# Allegro board pc053a_toplevel_08.brd
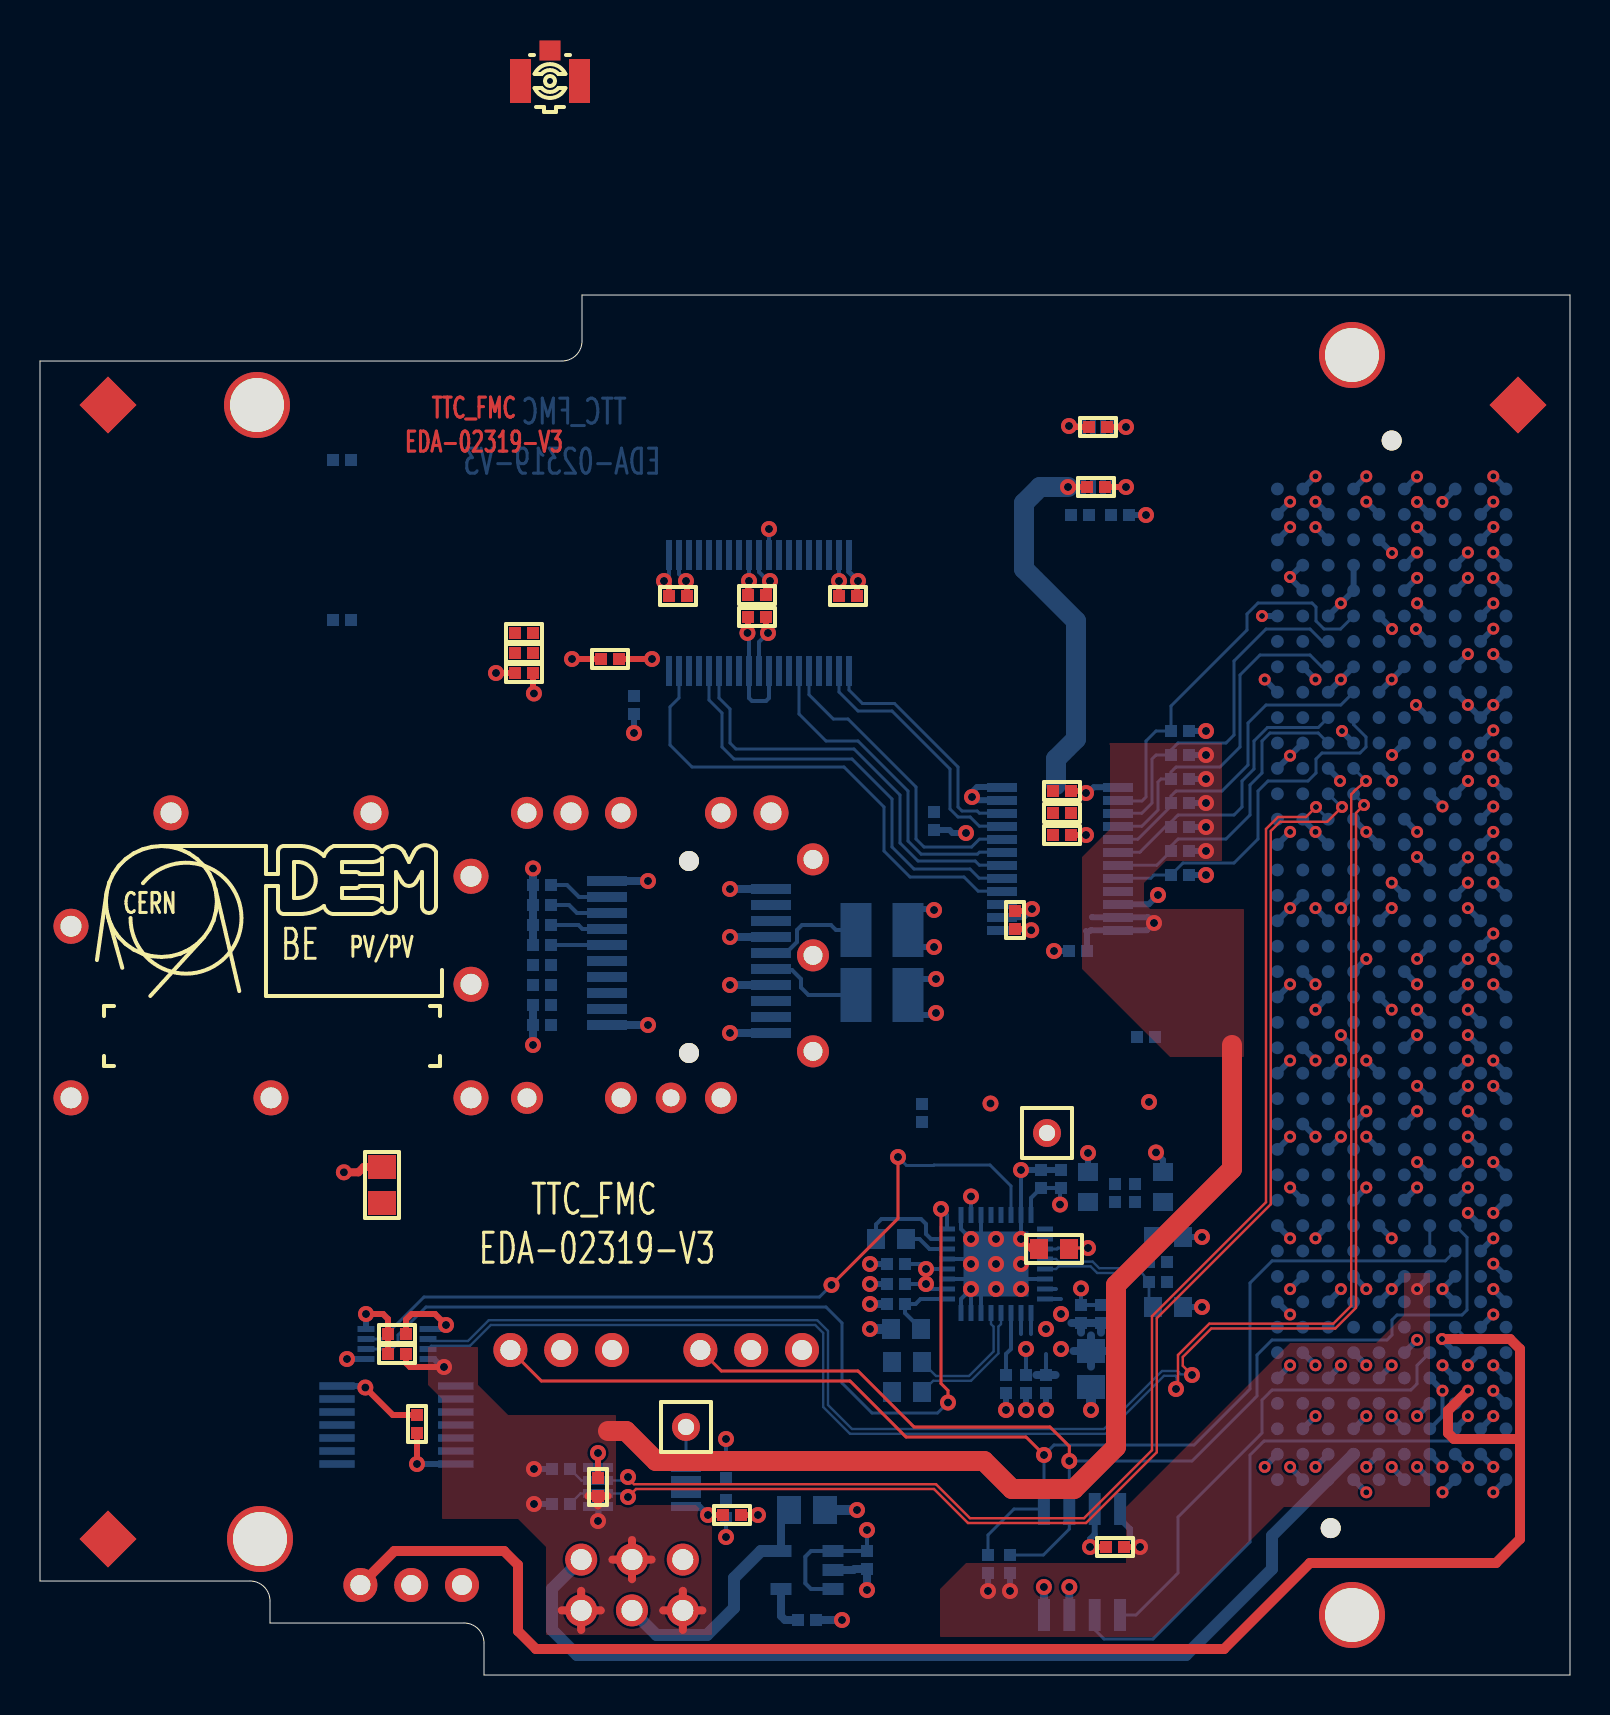
[diagram p0: board, top side]
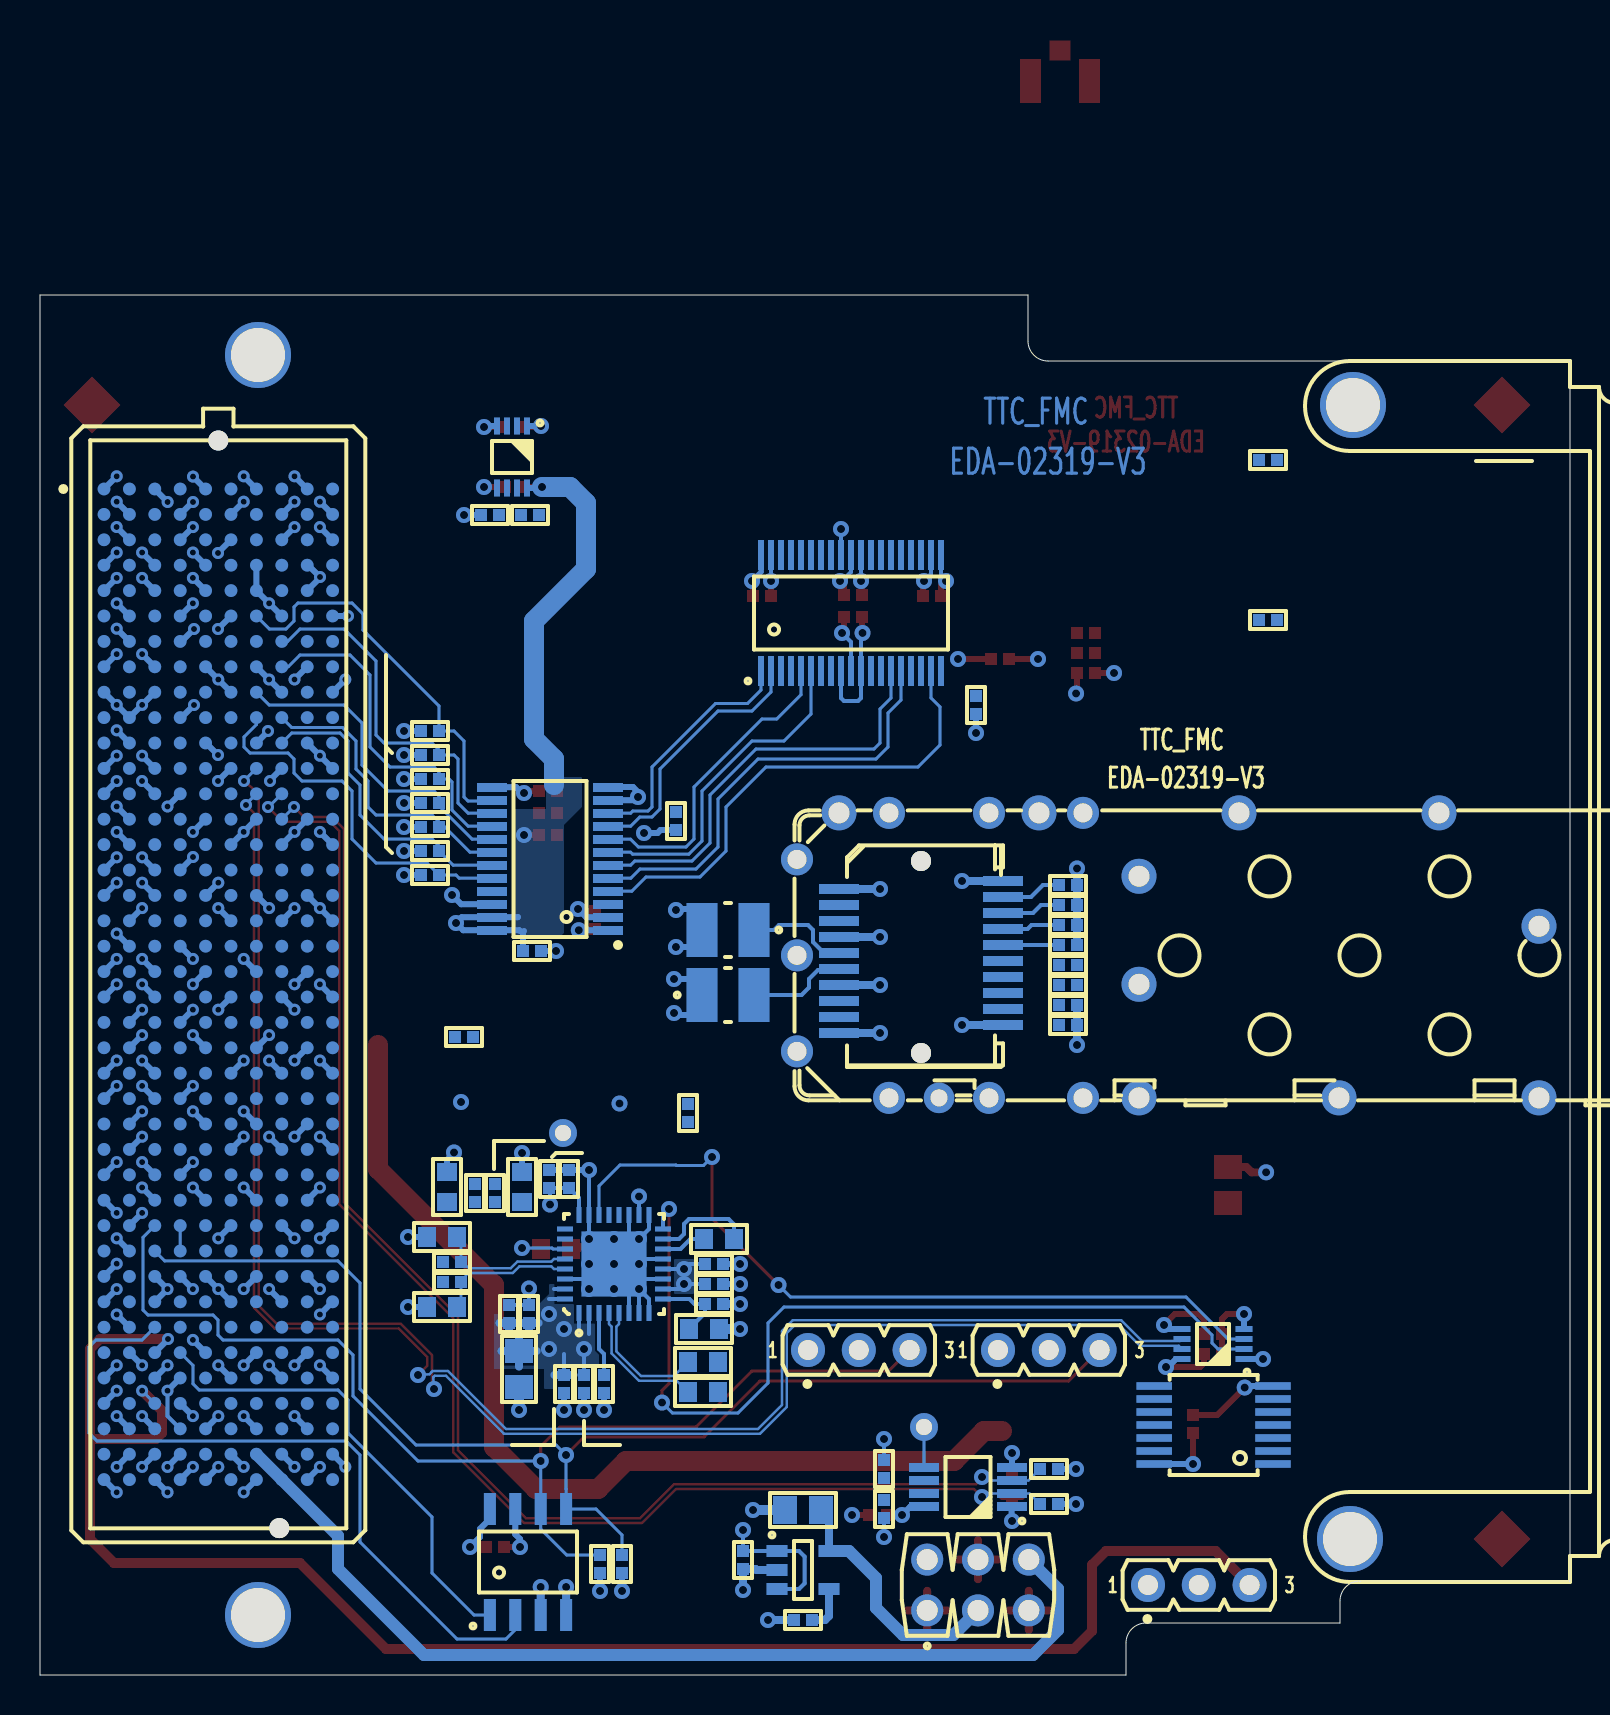
[diagram p1: board, bottom side, seen from below]

Outline 76.5 x 69 mm; copper layers: TOP, L2PWR, L3GND, BOTTOM. Coordinates in mm from the lower left corner of the outline.
Outline path: 0,65.7 26.1,65.7 arc(26.81,65.99) 27.1,66.7 27.1,69 76.5,69 76.5,0 22.2,0 22.2,1.6 arc(21.91,2.31) 21.2,2.6 11.5,2.6 11.5,3.7 arc(11.21,4.41) 10.5,4.7 0,4.7 0,65.7

## Design rules (mm)
constraint set DEFAULT: min track width 0.15
net group CDR_CLKOUT: nets CDR_CLKO_N CDR_CLKO_P
net group CDR_DATAOUT: nets CDR_DO_N CDR_DO_P
net group DATAOUT: nets DATAOUT_N DATAOUT_P
net group FMC_LA06: nets FMC_LA06_N FMC_LA06_P
net group FMC_LA07: nets FMC_LA07_N FMC_LA07_P
net group FMC_LA08: nets FMC_LA08_N FMC_LA08_P
net group FMC_LA10: nets FMC_LA10_N FMC_LA10_P
net group IN: nets IN_N IN_P
nets with their own width: min track width 0.3; nets CVCC GND P3V3

## Placement (name value [footprint] x y rotation side)
C1  100nF  [C0402]  24.2 50.1 180 top
C2  100nF  [C0402]  28.5 50.8 180 top
C3  100nF  [C0402]  31.9 53.95 0 top
C4  100nF  [C0402]  35.85 54 180 top
C5  100nF  [C0402]  35.85 52.9 180 top
C6  100nF  [C0402]  40.4 53.95 180 top
C7  100nF  [C0402]  52.9 62.4 0 top
C8  100nF  [C0402]  52.8 59.4 180 top
C10  100nF  [C0402]  51.1 44.2 180 top
C11  100nF  [C0402]  48.75 37.75 270 top
C12  2.2uF  [C0805]  17.1 24.5 270 top
C13  100nF  [C0402]  17.85 17.05 180 top
C14  100nF  [C0402]  17.85 16.05 0 top
C15  100nF  [C0402]  18.85 12.55 270 top
C16  100nF  [C0402]  27.9 9.4 270 top
C17  100nF  [C0402]  34.6 8 180 top
C18  100nF  [C0402]  53.75 6.4 0 top
C20  100nF  [C0402]  29.7 48.5 270 bottom
C21  100nF  [C0402]  15.1 60.75 180 bottom
C22  100nF  [C0402]  15.1 52.75 180 bottom
C23  100nF  [C0402]  51.9 36.2 0 bottom
C24  100nF  [C0402]  44.7 42.7 270 bottom
C25  100nF  [C0402]  55.3 31.9 180 bottom
C26  100nF  [C0402]  44.1 28.1 90 bottom
C27  100nF  [C0402]  54.75 24.1 90 bottom
C28  100nF  [C0402]  53.75 24.1 90 bottom
C29  100nF  [C0402]  51.05 24.8 270 bottom
C30  1.0nF  [C0402]  50.05 24.8 270 bottom
C31  100nF  [C0402]  55.9 20.65 0 bottom
C32  100nF  [C0402]  55.9 19.65 0 bottom
C33  100nF  [C0402]  53.05 18.05 270 bottom
C34  1.0nF  [C0402]  52.05 18.05 270 bottom
C35  10uF  [C0805]  52.55 15.3 90 bottom
C36  100nF  [C0402]  50.3 14.55 90 bottom
C37  1.0nF  [C0402]  49.3 14.55 90 bottom
C38  100nF  [C0402]  48.3 14.55 90 bottom
C39  470nF  [C0603]  42.55 21.8 0 bottom
C40  100nF  [C0402]  42.8 20.55 0 bottom
C41  1.0nF  [C0402]  42.8 19.55 0 bottom
C42  100nF  [C0402]  42.8 18.55 0 bottom
C43  1.5uF  [C0603]  43.35 15.65 0 bottom
C44  1.5uF  [C0603]  43.35 14.15 0 bottom
C45  2.2uF  [C0805]  38.35 8.25 180 bottom
C46  100nF  [C0402]  41.35 5.75 90 bottom
C47  100nF  [C0402]  38.35 2.75 180 bottom
IC1  -  [SOIC127P600X175-8N]  52.1 5.65 90 bottom
IC2  -  [SOP50P310X90-8N]  52.9 60.9 270 bottom
IC4  -  [SOP50P640X120-38N]  35.95 53.1 90 bottom
IC5  -  [SOP65P640X120-24N]  51 40.8 0 bottom
IC6  -  [TSSOP14MA_065]  14.85 10.55 90 bottom
IC12  -  [QFN50P500X500X100-33N-S325]  47.8 20.55 90 bottom
IC15  -  [SOP65P490X110-8N]  30.1 9.4 0 bottom
IC16  -  [SOP50P310X90-8N]  17.85 16.55 0 bottom
J4  -  [TYCO_1888247-1]  32.45 35.9 0 bottom
J5  -  [SAMTEC_MTLW-103-07-L-S-250]  35.56 16.25 180 bottom
J6  -  [SAMTEC_MTLW-103-07-L-S-250]  26.06 16.25 180 bottom
J7  -  [MOLEX_90131-0123]  29.6 4.5 180 bottom
J8  -  [SAMTEC_MTLW-103-07-L-S-250]  18.56 4.5 180 bottom
L1  4.7uH  [INDC3225X220N]  42.1 37.25 0 bottom
L2  4.7uH  [INDC3225X220N]  42.1 34 180 bottom
NOREF  -  []  96.5 -16 0 top
NOREF#2  -  []  -18.77 254.4 0 top
NOREF#3  -  []  -17.4 -17.4 0 top
NOREF#4  -  []  -14.3 0 0 top
NOREF#5  -  []  11 63.45 90 top
NOREF#6  -  []  0 4.65 0 top
NOREF#7  -  []  0 0 0 top
NOREF#8  -  []  79.4 51.5 0 top
NOREF#9  -  []  -14.3 69 0 top
NOREF#10  -  []  -17.4 -17.4 0 top
NOREF#11  -  []  11.5 2.6 0 top
NOREF#12  -  []  2.6 -16.15 0 top
NOREF#13  -  []  266.9 -16.15 0 top
NOREF#14  -  [unnamed#2]  3.4 63.5 0 top
NOREF#15  -  []  0 4.7 90 top
NOREF#16  -  []  -18.77 249.4 0 top
NOREF#17  -  [unnamed#3]  10.85 63.5 0 top
NOREF#18  -  []  -14.3 168 0 top
NOREF#19  -  []  -19.38 84 0 top
NOREF#20  -  [unnamed#3]  65.6 66 0 top
NOREF#21  -  []  -7.4 -16.15 0 top
NOREF#22  -  []  76.5 0 90 top
NOREF#23  -  [unnamed#3]  11 6.8 0 top
NOREF#24  -  []  -14.3 237 0 top
NOREF#25  -  []  -19.38 153 0 top
NOREF#26  -  []  22.2 -3 0 top
NOREF#27  -  []  -34.4 -47 0 top
NOREF#28  -  []  22.2 0 90 top
NOREF#29  -  []  76 185.5 0 top
NOREF#30  -  []  133.3 -3.6 0 top
NOREF#31  -  []  -17.4 -17.4 0 top
NOREF#32  -  []  173 -16 0 top
NOREF#33  -  []  12.65 64.3 0 top
NOREF#34  -  []  -17.4 170.4 0 top
NOREF#35  -  []  65.6 3 0 top
NOREF#36  -  []  0 65.7 0 top
NOREF#37  -  []  76 219.5 0 top
NOREF#38  -  []  0 65.7 0 top
NOREF#39  -  []  11.5 2.6 90 top
NOREF#40  -  []  76 101.5 0 top
NOREF#41  -  []  26.9 66.1 0 top
NOREF#42  -  []  11.21 4.4 0 top
NOREF#43  -  []  11.5 -2.5 0 top
NOREF#44  -  []  36.8 -3.6 0 top
NOREF#45  -  []  76 135.5 0 top
NOREF#46  -  []  22 2.2 0 top
NOREF#47  -  []  0 -3 0 top
NOREF#48  -  []  180.4 -21.05 0 top
NOREF#49  -  [unnamed#3]  65.6 3 0 top
NOREF#50  -  []  109.15 64.3 0 top
NOREF#51  -  []  79.5 0 90 top
NOREF#52  -  []  0 -16 0 top
NOREF#53  -  []  14.55 78.9 0 top
NOREF#54  -  []  76 17.5 0 top
NOREF#55  -  []  0 64.3 0 top
NOREF#56  -  []  76.5 -16 0 top
NOREF#57  -  []  -2.4 48 0 top
NOREF#58  -  []  -14.4 165.4 0 top
NOREF#59  -  []  -14.4 -12.4 0 top
NOREF#60  -  [unnamed#2]  3.4 6.8 0 top
NOREF#61  -  []  27.1 69 0 top
NOREF#62  -  [unnamed#2]  73.9 63.5 0 top
NOREF#63  -  []  193.22 -17.27 0 top
P1  -  [SAMTEC_SEAM-40-035-S-10-2-A]  67.58 34.53 90 bottom
PX1  -  [HIROSE_U-FL-R-SMT-1_10]  25.5 79.7 0 top
R3  4.7k  [C0402]  24.2 52.1 180 top
R4  4.7k  [C0402]  24.2 51.1 180 top
R6  4.7k  [C0402]  51.1 43.1 0 top
R7  100k  [C0402]  51.1 42 0 top
R12  00  [C0603]  50.7 21.3 180 top
R13  4.7k  [C0402]  54 58 180 bottom
R15  4.7k  [C0402]  57 47.2 0 bottom
R16  4.7k  [C0402]  57 46 0 bottom
R17  4.7k  [C0402]  57 44.8 0 bottom
R18  4.7k  [C0402]  57 43.6 0 bottom
R19  4.7k  [C0402]  57 42.4 0 bottom
R20  4.7k  [C0402]  57 41.2 0 bottom
R21  4.7k  [C0402]  57 40 0 bottom
R22  4.7k  [C0402]  25.1 39.5 0 bottom
R23  4.7k  [C0402]  25.1 38.5 0 bottom
R24  4.7k  [C0402]  25.1 37.5 180 bottom
R25  4.7k  [C0402]  25.1 36.5 180 bottom
R27  XX  [C0402]  52 58 0 bottom
R28  4.7k  [C0402]  25.1 33.5 0 bottom
R29  4.7k  [C0402]  25.1 32.5 0 bottom
R30  100  [C0603]  56.15 24.4 90 bottom
R31  100  [C0603]  52.4 24.4 90 bottom
R32  100  [C0603]  56.4 21.9 0 bottom
R33  100  [C0603]  56.4 18.4 0 bottom
R34  00  [C0603]  43.3 17.3 0 bottom
R36  XX  [C0402]  25.1 35.5 180 bottom
R37  100  [C0402]  25.1 34.5 180 bottom
R38  4.7k  [C0402]  48.5 5.55 270 bottom
R39  4.7k  [C0402]  47.4 5.55 270 bottom
R40  4.7k  [C0402]  34.3 10.3 270 bottom
R41  4.7k  [C0402]  34.3 8.3 90 bottom
R42  4.7k  [C0402]  26.05 10.3 180 bottom
R43  4.7k  [C0402]  26.05 8.55 180 bottom
REG1  -  [SOT95P280X110-5N]  38.35 5.25 180 bottom
SFP1  -  [MOLEX_74737004]  32.45 35.95 0 bottom
TP1  -  [TP_HOLE_08]  50.35 27.1 0 top
TP2  -  [TP_HOLE_08]  32.3 12.4 0 top

## Library data of the parts
C1-C8 C10 C11 C13-C18 C23 C25 C26 C29 C31-C33 C36 C38 C40 C42 C46 C47 = CAPCERSMDCL2: part number: CAPCERSMDCL2_0402-100NF,16V_GEN; tolerance: 10%
C12 C45 = CAPCERSMDCL2: part number: CAPCERSMDCL2_0805-2.2UF,10V_GEN; tolerance: +80%-20%
C20-C22 C24 C27 C28 = CAPCERSMDCL2: part number: CAPCERSMDCL2_0402-100NF_X7R,16V; tolerance: 10%
C30 C34 C37 C41 = CAPCERSMDCL2: part number: CAPCERSMDCL2_0402-1.0NF,50V_GEN; tolerance: 10%
C35 = CAPCERSMDCL2: part number: CAPCERSMDCL2_0805-10UF,16V; tolerance: 10%
C39 = CAPCERSMDCL2: part number: CAPCERSMDCL2_0603-470NF,6.3V; tolerance: 10%
C43 C44 = CAPCERSMDCL2: part number: CAPCERSMDCL2_0603-1.5UF,6.3V; tolerance: 10%
IC1 = 24AA025E48: part number: 24AA025E48T-I/SN
IC2 IC16 = 74AVC2T45: part number: SN74AVC2T45DCU
IC4 = SN65LVDT125: part number: SN65LVDT125DBT
IC5 = 74AVC8T245: part number: SN74AVC8T245PW
IC6 = 74LCX04: part number: 74LCX04MTC
IC12 = ADN2814: part number: ADN2814ACPZ
IC15 = PCA9517: part number: PCA9517DGKR
J4 = CON20P_SFP: part number: CON20P_SFP-1888247-1
J5 J6 J8 = CON3P: part number: CON3P-MTLW-103-07-L-S-250
J7 = CON6P: part number: CON6P-90131-0123
L1 L2 = INDUCTANCE: part number: INDUCTANCE_LQH32C_23-4.7UH
P1 = CON400P_40ABCDEFGHJK: part number: CON400P_40ABCDEFGHJK-SEAM-40-03.5-S-10-2-A-K-TR
PX1 = PCOAX: part number: PCOAX-U.FL-R-SMT-1(10)
R3 R4 R6 R13 R15-R25 R28 R29 R38-R43 = RSMD0402: part number: RSMD0402_1/16W-4.7K,1%; tolerance: 1%
R7 = RSMD0402: part number: RSMD0402_1/16W-100K,1%; tolerance: 1%
R12 R34 = RSMD0603: part number: RSMD0603_-00,
R27 R36 = RSMD0402: part number: RSMD0402_0.0625W-XX,1%; tolerance: 1%
R30-R33 = RSMD0603: part number: RSMD0603_1/10W-100,1%; tolerance: 1%
R37 = RSMD0402: part number: RSMD0402_1/16W-100,1%; tolerance: 1%
REG1 = TPS799XX: part number: TPS79925DDCT
SFP1 = SFP_CAGE: part number: SFP_CAGE-SP-74737-004
TP1 TP2 = TP: part number: TP_HOLE-0.8MM

## Footprints (pads in the part's own frame, mm; a bottom-side part is the same pattern mirrored in y, then rotated)
C0402
  rect 0.6x0.6 smd: 1(-0.45,0) 2(0.45,0)
C0603
  rect 0.9x1 smd: 1(-0.75,0) 2(0.75,0)
C0805
  rect 1.2x1.4 smd: 1(-0.9,0) 2(0.9,0)
HIROSE_U-FL-R-SMT-1_10
  rect 1.05x1 smd: 1(0,1.525)
  rect 1.05x2.2 smd: 2(-1.475,0) 3(1.475,0)
INDC3225X220N
  rect 1.55x2.7 smd: 1(-1.3,0) 2(1.3,0)
MOLEX_90131-0123
  round 1.6 hole 1.05: 1(-2.54,-1.27) 2(-2.54,1.27) 3(0,-1.27) 4(0,1.27) 5(2.54,-1.27) 6(2.54,1.27)
MOLEX_74737004
  round 1.524 hole 0.85: 1(-0.9,7.094)
  round 1.75 hole 1.05: 2(-10.9,7.094) 3(-20.9,7.094) 4(-30.9,7.094) 5(-25.9,-7.156) 6(-15.9,-7.156) 7(-5.9,-7.156) 8(4.1,-7.156) 9(-10.9,1.414) 10(-10.9,-3.986) 11(-30.9,-1.486)
  round 1.6 hole 0.95: 12(-8.1,7.094) 13(-8.1,-7.156) 14(-3.4,7.094) 15(-3.4,-7.156) 16(1.6,7.094) 17(1.6,-7.156) 18(6.2,4.769) 19(6.2,-0.031) 20(6.2,-4.831)
  round 0 smd: NC(-4.1,3.369)
QFN50P500X500X100-33N-S325
  rect 0.8x0.25 smd: 1(-2.45,1.75) 2(-2.45,1.25) 3(-2.45,0.75) 4(-2.45,0.25) 5(-2.45,-0.25) 6(-2.45,-0.75) 7(-2.45,-1.25) 8(-2.45,-1.75) 17(2.45,-1.75) 18(2.45,-1.25) 19(2.45,-0.75) 20(2.45,-0.25) 21(2.45,0.25) 22(2.45,0.75) 23(2.45,1.25) 24(2.45,1.75)
  rect 0.25x0.8 smd: 9(-1.75,-2.45) 10(-1.25,-2.45) 11(-0.75,-2.45) 12(-0.25,-2.45) 13(0.25,-2.45) 14(0.75,-2.45) 15(1.25,-2.45) 16(1.75,-2.45) 25(1.75,2.45) 26(1.25,2.45) 27(0.75,2.45) 28(0.25,2.45) 29(-0.25,2.45) 30(-0.75,2.45) 31(-1.25,2.45) 32(-1.75,2.45)
  rect 3.25x3.25 smd: 33(0,0)
SAMTEC_MTLW-103-07-L-S-250
  round 1.7 hole 1: 1(-2.54,0) 2(0,0) 3(2.54,0)
SAMTEC_SEAM-40-035-S-10-2-A
  round 1 hole 1.3 unplated: (-27.19,-3.05) (27.19,0)
  round 0.64 smd: A1(24.765,5.715) A2(23.495,5.715) A3(22.225,5.715) A4(20.955,5.715) A5(19.685,5.715) A6(18.415,5.715) A7(17.145,5.715) A8(15.875,5.715) A9(14.605,5.715) A10(13.335,5.715) A11(12.065,5.715) A12(10.795,5.715) A13(9.525,5.715) A14(8.255,5.715) A15(6.985,5.715) A16(5.715,5.715) A17(4.445,5.715) A18(3.175,5.715) A19(1.905,5.715) A20(0.635,5.715) A21(-0.635,5.715) A22(-1.905,5.715) A23(-3.175,5.715) A24(-4.445,5.715) A25(-5.715,5.715) A26(-6.985,5.715) A27(-8.255,5.715) A28(-9.525,5.715) A29(-10.795,5.715) A30(-12.065,5.715) A31(-13.335,5.715) A32(-14.605,5.715) A33(-15.875,5.715) A34(-17.145,5.715) A35(-18.415,5.715) A36(-19.685,5.715) A37(-20.955,5.715) A38(-22.225,5.715) A39(-23.495,5.715) A40(-24.765,5.715) B1(24.765,4.445) B2(23.495,4.445) B3(22.225,4.445) B4(20.955,4.445) B5(19.685,4.445) B6(18.415,4.445) B7(17.145,4.445) B8(15.875,4.445) B9(14.605,4.445) B10(13.335,4.445) B11(12.065,4.445) B12(10.795,4.445) B13(9.525,4.445) B14(8.255,4.445) B15(6.985,4.445) B16(5.715,4.445) B17(4.445,4.445) B18(3.175,4.445) B19(1.905,4.445) B20(0.635,4.445) B21(-0.635,4.445) B22(-1.905,4.445) B23(-3.175,4.445) B24(-4.445,4.445) B25(-5.715,4.445) B26(-6.985,4.445) B27(-8.255,4.445) B28(-9.525,4.445) B29(-10.795,4.445) B30(-12.065,4.445) B31(-13.335,4.445) B32(-14.605,4.445) B33(-15.875,4.445) B34(-17.145,4.445) B35(-18.415,4.445) B36(-19.685,4.445) B37(-20.955,4.445) B38(-22.225,4.445) B39(-23.495,4.445) B40(-24.765,4.445) C1(24.765,3.175) C2(23.495,3.175) C3(22.225,3.175) C4(20.955,3.175) C5(19.685,3.175) C6(18.415,3.175) C7(17.145,3.175) C8(15.875,3.175) C9(14.605,3.175) C10(13.335,3.175) C11(12.065,3.175) C12(10.795,3.175) C13(9.525,3.175) C14(8.255,3.175) C15(6.985,3.175) C16(5.715,3.175) C17(4.445,3.175) C18(3.175,3.175) C19(1.905,3.175) C20(0.635,3.175) C21(-0.635,3.175) C22(-1.905,3.175) C23(-3.175,3.175) C24(-4.445,3.175) C25(-5.715,3.175) C26(-6.985,3.175) C27(-8.255,3.175) C28(-9.525,3.175) C29(-10.795,3.175) C30(-12.065,3.175) C31(-13.335,3.175) C32(-14.605,3.175) C33(-15.875,3.175) C34(-17.145,3.175) C35(-18.415,3.175) C36(-19.685,3.175) C37(-20.955,3.175) C38(-22.225,3.175) C39(-23.495,3.175) C40(-24.765,3.175) D1(24.765,1.905) D2(23.495,1.905) D3(22.225,1.905) D4(20.955,1.905) D5(19.685,1.905) D6(18.415,1.905) D7(17.145,1.905) D8(15.875,1.905) D9(14.605,1.905) D10(13.335,1.905) D11(12.065,1.905) D12(10.795,1.905) D13(9.525,1.905) D14(8.255,1.905) D15(6.985,1.905) D16(5.715,1.905) D17(4.445,1.905) D18(3.175,1.905) D19(1.905,1.905) D20(0.635,1.905) D21(-0.635,1.905) D22(-1.905,1.905) D23(-3.175,1.905) D24(-4.445,1.905) D25(-5.715,1.905) D26(-6.985,1.905) D27(-8.255,1.905) D28(-9.525,1.905) D29(-10.795,1.905) D30(-12.065,1.905) D31(-13.335,1.905) D32(-14.605,1.905) D33(-15.875,1.905) D34(-17.145,1.905) D35(-18.415,1.905) D36(-19.685,1.905) D37(-20.955,1.905) D38(-22.225,1.905) D39(-23.495,1.905) D40(-24.765,1.905) E1(24.765,0.635) E2(23.495,0.635) E3(22.225,0.635) E4(20.955,0.635) E5(19.685,0.635) E6(18.415,0.635) E7(17.145,0.635) E8(15.875,0.635) E9(14.605,0.635) E10(13.335,0.635) E11(12.065,0.635) E12(10.795,0.635) E13(9.525,0.635) E14(8.255,0.635) E15(6.985,0.635) E16(5.715,0.635) E17(4.445,0.635) E18(3.175,0.635) E19(1.905,0.635) E20(0.635,0.635) E21(-0.635,0.635) E22(-1.905,0.635) E23(-3.175,0.635) E24(-4.445,0.635) E25(-5.715,0.635) E26(-6.985,0.635) E27(-8.255,0.635) E28(-9.525,0.635) E29(-10.795,0.635) E30(-12.065,0.635) E31(-13.335,0.635) E32(-14.605,0.635) E33(-15.875,0.635) E34(-17.145,0.635) E35(-18.415,0.635) E36(-19.685,0.635) E37(-20.955,0.635) E38(-22.225,0.635) E39(-23.495,0.635) E40(-24.765,0.635) F1(24.765,-0.635) F2(23.495,-0.635) F3(22.225,-0.635) F4(20.955,-0.635) F5(19.685,-0.635) F6(18.415,-0.635) F7(17.145,-0.635) F8(15.875,-0.635) F9(14.605,-0.635) F10(13.335,-0.635) F11(12.065,-0.635) F12(10.795,-0.635) F13(9.525,-0.635) F14(8.255,-0.635) F15(6.985,-0.635) F16(5.715,-0.635) F17(4.445,-0.635) F18(3.175,-0.635) F19(1.905,-0.635) F20(0.635,-0.635) F21(-0.635,-0.635) F22(-1.905,-0.635) F23(-3.175,-0.635) F24(-4.445,-0.635) F25(-5.715,-0.635) F26(-6.985,-0.635) F27(-8.255,-0.635) F28(-9.525,-0.635) F29(-10.795,-0.635) F30(-12.065,-0.635) F31(-13.335,-0.635) F32(-14.605,-0.635) F33(-15.875,-0.635) F34(-17.145,-0.635) F35(-18.415,-0.635) F36(-19.685,-0.635) F37(-20.955,-0.635) F38(-22.225,-0.635) F39(-23.495,-0.635) F40(-24.765,-0.635) G1(24.765,-1.905) G2(23.495,-1.905) G3(22.225,-1.905) G4(20.955,-1.905) G5(19.685,-1.905) G6(18.415,-1.905) G7(17.145,-1.905) G8(15.875,-1.905) G9(14.605,-1.905) G10(13.335,-1.905) G11(12.065,-1.905) G12(10.795,-1.905) G13(9.525,-1.905) G14(8.255,-1.905) G15(6.985,-1.905) G16(5.715,-1.905) G17(4.445,-1.905) G18(3.175,-1.905) G19(1.905,-1.905) G20(0.635,-1.905) G21(-0.635,-1.905) G22(-1.905,-1.905) G23(-3.175,-1.905) G24(-4.445,-1.905) G25(-5.715,-1.905) G26(-6.985,-1.905) G27(-8.255,-1.905) G28(-9.525,-1.905) G29(-10.795,-1.905) G30(-12.065,-1.905) G31(-13.335,-1.905) G32(-14.605,-1.905) G33(-15.875,-1.905) G34(-17.145,-1.905) G35(-18.415,-1.905) G36(-19.685,-1.905) G37(-20.955,-1.905) G38(-22.225,-1.905) G39(-23.495,-1.905) G40(-24.765,-1.905) H1(24.765,-3.175) H2(23.495,-3.175) H3(22.225,-3.175) H4(20.955,-3.175) H5(19.685,-3.175) H6(18.415,-3.175) H7(17.145,-3.175) H8(15.875,-3.175) H9(14.605,-3.175) H10(13.335,-3.175) H11(12.065,-3.175) H12(10.795,-3.175) H13(9.525,-3.175) H14(8.255,-3.175) H15(6.985,-3.175) H16(5.715,-3.175) H17(4.445,-3.175) H18(3.175,-3.175) H19(1.905,-3.175) H20(0.635,-3.175) H21(-0.635,-3.175) H22(-1.905,-3.175) H23(-3.175,-3.175) H24(-4.445,-3.175) H25(-5.715,-3.175) H26(-6.985,-3.175) H27(-8.255,-3.175) H28(-9.525,-3.175) H29(-10.795,-3.175) H30(-12.065,-3.175) H31(-13.335,-3.175) H32(-14.605,-3.175) H33(-15.875,-3.175) H34(-17.145,-3.175) H35(-18.415,-3.175) H36(-19.685,-3.175) H37(-20.955,-3.175) H38(-22.225,-3.175) H39(-23.495,-3.175) H40(-24.765,-3.175) J1(24.765,-4.445) J2(23.495,-4.445) J3(22.225,-4.445) J4(20.955,-4.445) J5(19.685,-4.445) J6(18.415,-4.445) J7(17.145,-4.445) J8(15.875,-4.445) J9(14.605,-4.445) J10(13.335,-4.445) J11(12.065,-4.445) J12(10.795,-4.445) J13(9.525,-4.445) J14(8.255,-4.445) J15(6.985,-4.445) J16(5.715,-4.445) J17(4.445,-4.445) J18(3.175,-4.445) J19(1.905,-4.445) J20(0.635,-4.445) J21(-0.635,-4.445) J22(-1.905,-4.445) J23(-3.175,-4.445) J24(-4.445,-4.445) J25(-5.715,-4.445) J26(-6.985,-4.445) J27(-8.255,-4.445) J28(-9.525,-4.445) J29(-10.795,-4.445) J30(-12.065,-4.445) J31(-13.335,-4.445) J32(-14.605,-4.445) J33(-15.875,-4.445) J34(-17.145,-4.445) J35(-18.415,-4.445) J36(-19.685,-4.445) J37(-20.955,-4.445) J38(-22.225,-4.445) J39(-23.495,-4.445) J40(-24.765,-4.445) K1(24.765,-5.715) K2(23.495,-5.715) K3(22.225,-5.715) K4(20.955,-5.715) K5(19.685,-5.715) K6(18.415,-5.715) K7(17.145,-5.715) K8(15.875,-5.715) K9(14.605,-5.715) K10(13.335,-5.715) K11(12.065,-5.715) K12(10.795,-5.715) K13(9.525,-5.715) K14(8.255,-5.715) K15(6.985,-5.715) K16(5.715,-5.715) K17(4.445,-5.715) K18(3.175,-5.715) K19(1.905,-5.715) K20(0.635,-5.715) K21(-0.635,-5.715) K22(-1.905,-5.715) K23(-3.175,-5.715) K24(-4.445,-5.715) K25(-5.715,-5.715) K26(-6.985,-5.715) K27(-8.255,-5.715) K28(-9.525,-5.715) K29(-10.795,-5.715) K30(-12.065,-5.715) K31(-13.335,-5.715) K32(-14.605,-5.715) K33(-15.875,-5.715) K34(-17.145,-5.715) K35(-18.415,-5.715) K36(-19.685,-5.715) K37(-20.955,-5.715) K38(-22.225,-5.715) K39(-23.495,-5.715) K40(-24.765,-5.715)
SOIC127P600X175-8N
  rect 1.6x0.6 smd: 1(-2.65,1.905) 2(-2.65,0.635) 3(-2.65,-0.635) 4(-2.65,-1.905) 5(2.65,-1.905) 6(2.65,-0.635) 7(2.65,0.635) 8(2.65,1.905)
SOP50P310X90-8N
  rect 0.85x0.3 smd: 1(-1.55,0.75) 2(-1.55,0.25) 3(-1.55,-0.25) 4(-1.55,-0.75) 5(1.55,-0.75) 6(1.55,-0.25) 7(1.55,0.25) 8(1.55,0.75)
SOP50P640X120-38N
  rect 1.5x0.3 smd: 1(-2.9,4.5) 2(-2.9,4) 3(-2.9,3.5) 4(-2.9,3) 5(-2.9,2.5) 6(-2.9,2) 7(-2.9,1.5) 8(-2.9,1) 9(-2.9,0.5) 10(-2.9,0) 11(-2.9,-0.5) 12(-2.9,-1) 13(-2.9,-1.5) 14(-2.9,-2) 15(-2.9,-2.5) 16(-2.9,-3) 17(-2.9,-3.5) 18(-2.9,-4) 19(-2.9,-4.5) 20(2.9,-4.5) 21(2.9,-4) 22(2.9,-3.5) 23(2.9,-3) 24(2.9,-2.5) 25(2.9,-2) 26(2.9,-1.5) 27(2.9,-1) 28(2.9,-0.5) 29(2.9,0) 30(2.9,0.5) 31(2.9,1) 32(2.9,1.5) 33(2.9,2) 34(2.9,2.5) 35(2.9,3) 36(2.9,3.5) 37(2.9,4) 38(2.9,4.5)
SOP65P490X110-8N
  rect 1.5x0.45 smd: 1(-2.2,0.975) 2(-2.2,0.325) 3(-2.2,-0.325) 4(-2.2,-0.975) 5(2.2,-0.975) 6(2.2,-0.325) 7(2.2,0.325) 8(2.2,0.975)
SOP65P640X120-24N
  rect 1.5x0.45 smd: 1(-2.9,3.575) 2(-2.9,2.925) 3(-2.9,2.275) 4(-2.9,1.625) 5(-2.9,0.975) 6(-2.9,0.325) 7(-2.9,-0.325) 8(-2.9,-0.975) 9(-2.9,-1.625) 10(-2.9,-2.275) 11(-2.9,-2.925) 12(-2.9,-3.575) 13(2.9,-3.575) 14(2.9,-2.925) 15(2.9,-2.275) 16(2.9,-1.625) 17(2.9,-0.975) 18(2.9,-0.325) 19(2.9,0.325) 20(2.9,0.975) 21(2.9,1.625) 22(2.9,2.275) 23(2.9,2.925) 24(2.9,3.575)
SOT95P280X110-5N
  rect 1.05x0.6 smd: 1(-1.3,0.95) 2(-1.3,0) 3(-1.3,-0.95) 4(1.3,-0.95) 5(1.3,0.95)
TP_HOLE_08
  round 1.397 hole 0.813: 1(0,0)
TSSOP14MA_065
  rect 0.381x1.778 smd: 1(0,0) 2(0.65,0) 3(1.3,0) 4(1.95,0) 5(2.6,0) 6(3.25,0) 7(3.9,0) 8(3.9,5.94) 9(3.25,5.94) 10(2.6,5.94) 11(1.95,5.94) 12(1.3,5.94) 13(0.65,5.94) 14(0,5.94)
TYCO_1888247-1
  round 1 hole 1.4 unplated: (0,-4.8) (0,4.8)
  rect 2x0.5 smd: 1(-4.1,3.4) 2(-4.1,2.6) 3(-4.1,1.8) 4(-4.1,1) 5(-4.1,0.2) 6(-4.1,-0.6) 7(-4.1,-1.4) 8(-4.1,-2.2) 9(-4.1,-3) 10(-4.1,-3.8) 11(4.1,-3.4) 12(4.1,-2.6) 13(4.1,-1.8) 14(4.1,-1) 15(4.1,-0.2) 16(4.1,0.6) 17(4.1,1.4) 18(4.1,2.2) 19(4.1,3) 20(4.1,3.8)
unnamed#2
  rect 2.007x2.007 smd rot 45: (0,0)
  rect 2.007x2.007 smd rot 135: (0,0)
unnamed#3
  round 3.302 hole 2.7: (0,0)

## Nets
GND: C1.2(B<0>) C2.2(B<0>) C3.2(B<0>) C4.2(B<0>) C5.2(B<0>) C6.2(B<0>) C7.2(B<0>) C8.1(A<0>) C10.1(A<0>) C11.1(A<0>) C12.1(A<0>) C13.2(B<0>) C14.1(A<0>) C15.1(A<0>) C16.1(A<0>) C17.1(A<0>) C18.1(A<0>) C20.2(B<0>) C21.2(B<0>) C22.1(A<0>) C23.1(A<0>) C24.2(B<0>) C25.2(B<0>) C26.2(B<0>) C29.1(A<0>) C30.1(A<0>) C33.1(A<0>) C34.1(A<0>) C35.1(A<0>) C36.1(A<0>) C37.1(A<0>) C38.1(A<0>) C40.1(A<0>) C41.1(A<0>) C42.1(A<0>) C45.1(A<0>) C46.1(A<0>) C47.1(A<0>) IC1.3(A2) IC1.4(VSS) IC2.4(GND) IC4.9 IC4.11 IC4.21 IC4.28 IC4.30 IC4.37 IC5.2(DIR) IC5.11 IC5.12 IC5.13 IC5.22(OE*) IC6.7 IC12.6(SLICEP) IC12.7(SLICEN) IC12.8 IC12.11(REFCLKN) IC12.13 IC12.17 IC12.19(SADDRS) IC12.23 IC12.30 IC12.33(PAD) IC15.4 IC16.4(GND) J4.1(VEET1) J4.10(VEER1) J4.11(VEER2) J4.14(VEER3) J4.17(VEET2) J4.20(VEET3) J5.2(A<1>) J6.2(A<1>) J8.1(A<0>) P1.A1(A<1>) P1.A4(A<4>) P1.A5(A<5>) P1.A8(A<8>) P1.A9(A<9>) P1.A12(A<12>) P1.A13(A<13>) P1.A16(A<16>) P1.A17(A<17>) P1.A20(A<20>) P1.A21(A<21>) P1.A24(A<24>) P1.A25(A<25>) P1.A28(A<28>) P1.A29(A<29>) P1.A32(A<32>) P1.A33(A<33>) P1.A36(A<36>) P1.A37(A<37>) P1.A40(A<40>) P1.B2(B<2>) P1.B3(B<3>) P1.B6(B<6>) P1.B7(B<7>) P1.B10(B<10>) P1.B11(B<11>) P1.B14(B<14>) P1.B15(B<15>) P1.B18(B<18>) P1.B19(B<19>) P1.B22(B<22>) P1.B23(B<23>) P1.B26(B<26>) P1.B27(B<27>) P1.B30(B<30>) P1.B31(B<31>) P1.B34(B<34>) P1.B35(B<35>) P1.B38(B<38>) P1.B39(B<39>) P1.C1(C<1>) P1.C4(C<4>) P1.C5(C<5>) P1.C8(C<8>) P1.C9(C<9>) P1.C12(C<12>) P1.C13(C<13>) P1.C16(C<16>) P1.C17(C<17>) P1.C20(C<20>) P1.C21(C<21>) P1.C24(C<24>) P1.C25(C<25>) P1.C28(C<28>) P1.C29(C<29>) P1.C32(C<32>) P1.C33(C<33>) P1.C36(C<36>) P1.C38(C<38>) P1.C40(C<40>) P1.D2(D<2>) P1.D3(D<3>) P1.D6(D<6>) P1.D7(D<7>) P1.D10(D<10>) P1.D13(D<13>) P1.D16(D<16>) P1.D19(D<19>) P1.D22(D<22>) P1.D25(D<25>) P1.D28(D<28>) P1.D37(D<37>) P1.D39(D<39>) P1.E1(E<1>) P1.E4(E<4>) P1.E5(E<5>) P1.E8(E<8>) P1.E11(E<11>) P1.E14(E<14>) P1.E17(E<17>) P1.E20(E<20>) P1.E23(E<23>) P1.E26(E<26>) P1.E29(E<29>) P1.E32(E<32>) P1.E35(E<35>) P1.E38(E<38>) P1.E40(E<40>) P1.F2(F<2>) P1.F3(F<3>) P1.F6(F<6>) P1.F9(F<9>) P1.F12(F<12>) P1.F15(F<15>) P1.F18(F<18>) P1.F21(F<21>) P1.F24(F<24>) P1.F27(F<27>) P1.F30(F<30>) P1.F33(F<33>) P1.F36(F<36>) P1.F39(F<39>) P1.G1(G<1>) P1.G4(G<4>) P1.G5(G<5>) P1.G8(G<8>) P1.G11(G<11>) P1.G14(G<14>) P1.G17(G<17>) P1.G20(G<20>) P1.G23(G<23>) P1.G26(G<26>) P1.G29(G<29>) P1.G32(G<32>) P1.G35(G<35>) P1.G38(G<38>) P1.G40(G<40>) P1.H2(H<2>) P1.H3(H<3>) P1.H6(H<6>) P1.H9(H<9>) P1.H12(H<12>) P1.H15(H<15>) P1.H18(H<18>) P1.H21(H<21>) P1.H24(H<24>) P1.H27(H<27>) P1.H30(H<30>) P1.H33(H<33>) P1.H36(H<36>) P1.H39(H<39>) P1.J1(J<1>) P1.J4(J<4>) P1.J5(J<5>) P1.J8(J<8>) P1.J11(J<11>) P1.J14(J<14>) P1.J17(J<17>) P1.J20(J<20>) P1.J23(J<23>) P1.J26(J<26>) P1.J29(J<29>) P1.J32(J<32>) P1.J35(J<35>) P1.J38(J<38>) P1.J40(J<40>) P1.K2(K<2>) P1.K3(K<3>) P1.K6(K<6>) P1.K9(K<9>) P1.K12(K<12>) P1.K15(K<15>) P1.K18(K<18>) P1.K21(K<21>) P1.K24(K<24>) P1.K27(K<27>) P1.K30(K<30>) P1.K33(K<33>) P1.K36(K<36>) P1.K39(K<39>) PX1.2 PX1.3 R3.2(B<0>) R4.2(B<0>) R6.2(B<0>) R7.1(A<0>) R12.2(B<0>) R13.1(A<0>) R15.2(B<0>) R21.2(B<0>) R27.2(B<0>) R34.1(A<0>) R36.2(B<0>) REG1.2(GND) SFP1.1 SFP1.2 SFP1.3 SFP1.4 SFP1.5 SFP1.6 SFP1.7 SFP1.8 SFP1.9 SFP1.10 SFP1.11 SFP1.12 SFP1.13 SFP1.14 SFP1.15 SFP1.16 SFP1.17 SFP1.18 SFP1.19 SFP1.20
P1V8: C12.2(B<0>)
P2V5: C45.2(B<0>) J7.3(A<2>) REG1.5(OUT)
P3V3: C1.1(A<0>) C2.1(A<0>) C3.1(A<0>) C4.1(A<0>) C5.1(A<0>) C6.1(A<0>) C7.1(A<0>) C11.2(B<0>) C13.1(A<0>) C15.2(B<0>) C17.2(B<0>) C22.2(B<0>) C25.1(A<0>) C26.1(A<0>) C29.2(B<0>) C30.2(B<0>) C33.2(B<0>) C34.2(B<0>) C35.2(B<0>) C36.2(B<0>) C37.2(B<0>) C40.2(B<0>) C41.2(B<0>) C46.2(B<0>) IC2.1(VCCA) IC2.5(DIR) IC4.10 IC4.20 IC4.29 IC4.38 IC5.1 IC6.14 IC12.1 IC12.2 IC12.10(REFCLKP) IC12.12 IC12.18 IC12.24 IC12.31 IC12.32 IC15.8(VCCB) IC16.1(VCCA) IC16.5(DIR) J7.2(A<1>) J8.2(A<1>) L1.2(B<0>) L2.1(A<0>) P1.C39(C<39>) P1.D36(D<36>) P1.D38(D<38>) P1.D40(D<40>) R22.1(A<0>) R23.1(A<0>) R24.2(B<0>) R25.2(B<0>) R28.1(A<0>) R29.1(A<0>) R30.2(B<0>) R31.2(B<0>) R32.2(B<0>) R33.2(B<0>) R40.1(A<0>) R41.1(A<0>) REG1.1(IN) REG1.3(EN)
P12V: J8.3(A<2>) P1.C35(C<35>) P1.C37(C<37>)
1DE: IC4.34(DE<0>)
CDR_CLKO_N: IC12.25(CLKOUTN) R30.1(A<0>)
CDR_CLKO_P: IC12.26(CLKOUTP) R31.1(A<0>)
CDR_DI_N: C44.1(A<0>)
CDR_DI_P: C43.1(A<0>) IC4.33(Y<0>)
CDR_DO_N: C31.2(B<0>) IC4.8(B<0>)
CDR_DO_P: C32.2(B<0>) IC4.7(A<0>)
CDR_LOL: IC6.1(A<0>) IC12.16(LOL) IC16.2(A1)
CDR_LOS: IC6.3(A<0>) IC12.22(LOS) IC16.3(A2)
CRD_DI_N: IC4.32(Z*<0>)
CTRLVCC: C18.2(B<0>) IC1.8(VCC) P1.D32(D<32>) R38.2(B<0>) R39.2(B<0>)
CVCC: C8.2(B<0>) C14.2(B<0>) C16.2(B<0>) C23.2(B<0>) IC2.8(VCCB) IC5.23 IC5.24 IC15.1(VCCA) IC16.8(VCCB) J7.1(A<0>) J7.4(A<3>) J7.5(A<4>) R7.2(B<0>) R16.2(B<0>) R17.2(B<0>) R18.2(B<0>) R19.2(B<0>) R20.2(B<0>) R42.2(B<0>) R43.2(B<0>)
DATAOUT_N: C31.1(A<0>) IC12.28(DATAOUTN) R32.1(A<0>)
DATAOUT_P: C32.1(A<0>) IC12.29(DATAOUTP) R33.1(A<0>)
FFD_DI_N: P1.G22(G<22>)
FFD_DI_P: P1.G21(G<21>)
FFD_DO_N: IC4.13(B<0>)
FFD_DO_P: IC4.12(A<0>)
FMC_1DE: P1.G30(G<30>) R13.2(B<0>)
FMC_CLK_N: P1.H5(H<5>)
FMC_CLK_P: P1.H4(H<4>)
FMC_DI_N: IC4.23(Z*<0>) P1.H23(H<23>)
FMC_DI_P: IC4.24(Y<0>) P1.H22(H<22>)
FMC_GA0: IC1.2(A1) P1.C34(C<34>)
FMC_GA1: IC1.1(A0) P1.D35(D<35>)
FMC_LA00_P: IC5.14(B<0>) P1.G6(G<6>) R15.1(A<0>)
FMC_LA01_N: P1.D9(D<9>)
FMC_LA02_N: IC5.16(B<0>) P1.H8(H<8>) R17.1(A<0>)
FMC_LA02_P: IC5.15(B<0>) P1.H7(H<7>) R16.1(A<0>)
FMC_LA03_N: IC5.20(B<0>) P1.G10(G<10>) R21.1(A<0>)
FMC_LA03_P: IC5.17(B<0>) P1.G9(G<9>) R18.1(A<0>)
FMC_LA04_N: IC5.19(B<0>) P1.H11(H<11>) R20.1(A<0>)
FMC_LA04_P: IC5.18(B<0>) P1.H10(H<10>) R19.1(A<0>)
FMC_LA05_N: P1.D12(D<12>)
FMC_LA05_P: IC5.21(B<0>) P1.D11(D<11>)
FMC_LA06_N: P1.C11(C<11>)
FMC_LA06_P: P1.C10(C<10>)
FMC_LA07_N: IC15.3(SDAA) P1.H14(H<14>) R42.1(A<0>) TP1.1(A<0>)
FMC_LA07_P: IC15.2(SCLA) P1.H13(H<13>) R43.1(A<0>)
FMC_LA08_N: IC16.6(B2) P1.G13(G<13>)
FMC_LA08_P: IC16.7(B1) P1.G12(G<12>)
FMC_LA10_N: P1.C15(C<15>)
FMC_LA10_P: P1.C14(C<14>)
FMC_SCL: IC1.6(SCL) IC12.20(SCK) J5.3(A<2>) P1.C30(C<30>) R38.1(A<0>)
FMC_SDA: IC1.5(SDA) IC12.21(SDA) J6.3(A<2>) P1.C31(C<31>) R39.1(A<0>)
FPGA_IN_SEL0: R6.1(A<0>)
FPGA_SFP_TX_DIS: P1.D17(D<17>) R4.1(A<0>)
FPGA_SFP_TX_FLT: IC2.7(B1) P1.D18(D<18>)
IN_N: C44.2(B<0>) IC12.4(NIN)
IN_P: C43.2(B<0>) IC12.5(PIN)
OSC_CLK_N: C28.2(B<0>)
OSC_CLK_P: C27.2(B<0>)
PAR_DI_N: P1.H29(H<29>)
PAR_DI_P: P1.H28(H<28>)
PAR_DO_N: P1.G19(G<19>)
PAR_DO_P: P1.G18(G<18>)
PAR_LED1: IC6.9(A<0>) P1.C22(C<22>)
PAR_LED2: IC6.5(A<0>) P1.C23(C<23>)
REC_CLK_N: P1.G3(G<3>)
REC_CLK_P: P1.G2(G<2>)
S10: IC4.1(S0<0>) IC5.10(A<0>)
S11: IC4.2(S1<0>) IC5.9(A<0>)
S20: IC4.5(S0<0>) IC5.8(A<0>)
S21: IC4.6(S1<0>) IC5.7(A<0>)
S30: IC4.14(S0<0>) IC5.6(A<0>)
S31: IC4.15(S1<0>) IC5.5(A<0>)
S40: IC4.18(S0<0>) IC5.4(A<0>)
S41: IC4.19(S1<0>) IC5.3(A<0>)
SERPAR_CLKI_N: R37.2(B<0>)
SERPAR_CLKI_P: R37.1(A<0>)
SERPAR_DI_N: IC4.4(B<0>)
SERPAR_DI_P: IC4.3(A<0>)
SERPAR_LED1: IC6.13(A<0>) P1.C18(C<18>)
SERPAR_LED2: IC6.11(A<0>) P1.C19(C<19>)
SFP_DI_N: IC4.17(B<0>) J4.12(RD-)
SFP_DI_P: IC4.16(A<0>) J4.13(RD+)
SFP_DO_N: IC4.26(Z*<0>) J4.19(TD-)
SFP_DO_P: IC4.27(Y<0>) J4.18(TD+)
SFP_SCL: IC15.7(SCLB) J4.5(MOD_DEF1/SCL) J5.1(A<0>) R41.2(B<0>)
SFP_SDA: IC15.6(SDAB) J4.4(MOD_DEF2/SDA) J6.1(A<0>) R40.2(B<0>)
SFP_TX_DISABLE: J4.3(TX_DISABLE) R28.2(B<0>)
SFP_TX_FAULT: IC2.2(A1) J4.2(TX_FAULT) R29.2(B<0>)
TO_COAX_N: IC4.35(Z*<0>)
TO_COAX_P: IC4.36(Y<0>) PX1.1(A)
UNNAMED_2_CAPCERSMDCL2_I68_B: C47.2(B<0>) REG1.4(NR)
UNNAMED_2_CAPCERSMDCL2_I245_B: C10.2(B<0>)
UNNAMED_2_CON400P40ABCDEFGHJK_I: P1.D30(D<30>) P1.D31(D<31>)
UNNAMED_2_PCA9517_I162_EN: IC15.5(EN) TP2.1(A<0>)
UNNAMED_3_74AVC2T45_I239_A2: IC2.3(A2)
UNNAMED_3_74AVC2T45_I239_B2: IC2.6(B2) R3.1(A<0>)
UNNAMED_3_RSMD0402_I293_A: IC4.22(DE<0>)
UNNAMED_3_RSMD0402_I295_A: IC4.31(DE<0>)
UNNAMED_3_SN65LVDT125_I187_DE: IC4.25(DE<0>)
UNNAMED_4_74LCX04_I72_Y: IC6.10(Y*<0>)
UNNAMED_4_74LCX04_I73_Y: IC6.8(Y*<0>)
UNNAMED_4_74LCX04_I74_Y: IC6.6(Y*<0>)
UNNAMED_4_74LCX04_I75_Y: IC6.12(Y*<0>)
UNNAMED_4_CAPCERSMDCL2_I57_A: C27.1(A<0>) R27.1(A<0>)
UNNAMED_4_CAPCERSMDCL2_I58_A: C28.1(A<0>) R36.1(A<0>)
UNNAMED_4_CAPCERSMDCL2_I62_A: C20.1(A<0>)
UNNAMED_4_CAPCERSMDCL2_I63_A: C21.1(A<0>)
UNNAMED_4_CAPCERSMDCL2_I64_A: C24.1(A<0>)
UNNAMED_11_74LCX04_I9_Y: IC6.4(Y*<0>)
UNNAMED_11_74LCX04_I179_Y: IC6.2(Y*<0>)
UNNAMED_11_ADN2814_I23_CF1: C39.1(A<0>) IC12.15(CF1)
UNNAMED_11_ADN2814_I23_CF2: C39.2(B<0>) IC12.14(CF2)
UNNAMED_11_ADN2814_I23_SQUELCH: IC12.27(SQUELCH) R12.1(A<0>)
UNNAMED_11_ADN2814_I23_THRADJ: C42.2(B<0>) IC12.9(THRADJ) R34.2(B<0>)
UNNAMED_11_ADN2814_I23_VREF: C38.2(B<0>) IC12.3(VREF)
UNNAMED_11_CON20PSFP_I175_LOS: J4.8(LOS) R23.2(B<0>)
UNNAMED_11_CON20PSFP_I175_MODDE: J4.6(MOD_DEF0/MOD_ABS) R25.1(A<0>)
UNNAMED_11_CON20PSFP_I175_RATES: J4.7(RATE_SELECT/RS0) R24.1(A<0>)
UNNAMED_11_CON20PSFP_I175_VCCR: J4.15(VCCR) L1.1(A<0>)
UNNAMED_11_CON20PSFP_I175_VCCT: J4.16(VCCT) L2.2(B<0>)
UNNAMED_11_CON20PSFP_I175_VEER: J4.9(VEER/RS1) R22.2(B<0>)
VPP: J7.6(A<5>) P1.G39(G<39>) P1.H40(H<40>)

Pads without a net: IC1 7; P1 A2 A3 A6 A7 A10 A11 A14 A15 A18 A19 A22 A23 A26 A27 A30 A31 A34 A35 A38 A39 B1 B4 B5 B8 B9 B12 B13 B16 B17 B20 B21 B24 B25 B28 B29 B32 B33 B36 B37 B40 C2 C3 C6 C7 C26 C27 D1 D4 D5 D8 D14 D15 D20 D21 D23 D24 D26 D27 D29 D33 D34 E2 E3 E6 E7 E9 E10 E12 E13 E15 E16 E18 E19 E21 E22 E24 E25 E27 E28 E30 E31 E33 E34 E36 E37 E39 F1 F4 F5 F7 F8 F10 F11 F13 F14 F16 F17 F19 F20 F22 F23 F25 F26 F28 F29 F31 F32 F34 F35 F37 F38 F40 G7 G15 G16 G24 G25 G27 G28 G31 G33 G34 G36 G37 H1 H16 H17 H19 H20 H25 H26 H31 H32 H34 H35 H37 H38 J2 J3 J6 J7 J9 J10 J12 J13 J15 J16 J18 J19 J21 J22 J24 J25 J27 J28 J30 J31 J33 J34 J36 J37 J39 K1 K4 K5 K7 K8 K10 K11 K13 K14 K16 K17 K19 K20 K22 K23 K25 K26 K28 K29 K31 K32 K34 K35 K37 K38 K40; SFP1 NC

## Via types
v1: diameter 0.6, hole 0.3, TOP to BOTTOM, 158 vias
v2: diameter 0.8, hole 0.4, TOP to BOTTOM, 116 vias

## Routing (per net, layer and track width the routed paths; a pad name or vN(x,y) marks a point on that pad's centre or on a via; arc(x,y) is an arc through that point)
GND: length 248
  TOP w0.3: C16.1 v2(27.9,11.1) ; C11.1 49.5,38.2 v2(49.6,38.3) ; v2(16.27,14.37) 17.64,13 C15.1 ; v2(52.3,44.1) 52.2,44.2 C10.1 ; C14.1 C13.2 17.4,17.8 17.15,18.05 v2(16.3,18.05) ; v2(35.45,54.7) 35.4,54.65 C4.2 ; v2(49.05,21.8) 49.55,21.3 R12.2 ; v2(22.8,50.1) C1.2 ; v2(54.3,62.4) C7.2 ; v2(54.3,59.4) C8.1 ; C5.2 35.4,52.13 v2(35.37,52.1) ; C2.2 v2(26.6,50.8) ; C17.1 v2(35.9,8) ; v2(32.3,54.7) 32.35,54.65 C3.2 ; C6.2 v2(39.95,54.7) ; C18.1 v2(52.5,6.4)
  TOP w0.4: C12.1 16.19,25.4 15.92,25.14 v2(15.19,25.14)
  BOTTOM w0.2: IC12.8 46.05,18.8 v2(46.55,19.3) ; IC12.13 46.3,20.8 v2(46.55,20.55) ; IC12.11 47.05,19.8 v2(47.8,20.55) 47.05,21.3 ; 47.05,21.3 IC12.19 ; 47.05,21.3 v2(46.55,21.8) 46.05,22.3 IC12.17 ; IC12.30 49.25,19.8 49.05,19.6 v2(49.05,19.3) ; IC4.37 v2(39.95,54.7) ; v2(46.55,19.3) 46.85,19.3 47.05,19.1 IC12.6 ; v2(46.55,19.3) IC12.7 ; v2(35.37,52.1) 35.37,52.03 35.45,51.95 IC4.11 35.45,48.85 35.6,48.7 36.3,48.7 36.45,48.85 IC4.9 ; IC4.30 v2(36.45,57.3) ; v2(32.3,54.7) 31.95,55.05 IC4.21 ; v2(49.05,21.8) IC12.23 v2(49.05,25.25) ; IC4.28 v2(35.45,54.7) ; v2(52.05,19.33) C34.1 C33.1
  BOTTOM w0.3: P1.F30 v1(67.58,21.84) ; P1.K21 v1(62.5,34.53) ; P1.F3 67.6,56.11 v1(67.6,56.1) ; P1.G29 v1(66.31,24.38) ; P1.B38 v1(72.66,12.95) ; P1.D16 68.85,40.89 v1(68.85,40.9) ; P1.B3 v1(72.67,57.4) ; P1.G14 v1(66.31,42.16) P1.F15 ; v2(49.05,25.25) C30.1 C29.1 ; v1(68.8,48.5) 69.43,47.87 P1.D10 ; P1.B14 v1(72.66,43.42) ; P1.H6 v1(65.04,53.59) P1.G5 P1.G4 ; P1.H2 v1(63.77,58.66) ; IC16.4 v2(16.3,18.05) ; v2(16.27,14.37) 16.19,14.45 IC6.7 ; P1.E35 v1(68.85,16.76) ; P1.E17 v1(67.58,39.62) ; P1.J26 v1(63.77,26.91) ; P1.B23 v1(71.39,32) ; v1(70.12,58.65) 70.76,59.29 P1.C1 ; P1.F24 v1(66.31,30.73) ; P1.J14 v1(63.77,42.16) P1.H15 ; P1.F18 v1(67.58,38.34) ; 54,38.54 55.44,38.54 v2(55.9,39) ; P1.D37 v1(68.85,12.95) ; P1.D39 v1(70.12,10.41) ; P1.E26 v1(68.85,28.18) ; P1.B19 v1(72.66,37.08) ; P1.K36 v1(62.5,15.48) ; P1.G40 v1(66.31,9.13) ; 48.06,44.39 48.05,44.4 46.85,44.4 46.6,44.15 v2(46.6,43.9) 46.76,43.74 48.06,43.74 ; P1.A9 v1(72.66,48.51) P1.B10 v1(71.39,48.51) P1.C9 ; P1.B15 v1(72.66,42.16) ; v1(68.85,58.65) 68.87,58.65 P1.D2 ; P1.H27 v1(65.04,26.91) ; P1.F39 v1(66.31,10.41) ; P1.E4 v1(68.85,56.12) ; P1.C5 v1(71.39,54.85) ; P1.C20 v1(71.39,35.8) ; P1.D3 v1(68.85,57.4) ; P1.F9 v1(67.58,49.77) P1.E8 ; P1.J11 v1(62.5,45.97) P1.K12 ; P1.H12 65,44.74 v1(65,44.7) ; P1.A36 v1(72.66,15.48) ; P1.K2 v1(62.5,58.66) ; P1.J4 63.09,55.49 v1(62.5,54.9) 62.5,54.86 P1.J5 ; C23.1 v2(50.7,36.2) ; P1.K24 v1(62.5,30.73) ; P1.E32 v1(67.58,19.3) P1.F33 ; P1.E40 v1(67.58,10.41) ; P1.C24 v1(71.39,30.73) ; P1.E38 v1(67.58,12.95) ; P1.J8 v1(63.77,49.77) ; v2(54.3,62.4) 54.25,62.45 IC2.4 ; P1.K33 v1(62.5,18.02) ; P1.A33 v1(72.66,19.3) ; P1.K15 v1(62.5,42.16) ; P1.H24 v1(65.04,30.73) ; R13.1 v2(55.3,58) ; v1(68.85,59.92) 68.23,59.3 P1.E1 ; P1.C12 v1(71.39,45.97) ; P1.C29 v1(71.39,24.38) ; P1.J17 v1(62.5,38.34) P1.K18 ; P1.A29 v1(72.66,23.11) ; R15.2 v2(58.3,47.2) ; P1.C40 v1(70.12,9.13) ; P1.B18 v1(71.39,38.34) ; v1(67.6,44.7) 66.97,45.33 P1.F12 ; P1.D28 v1(68.85,25.64) ; P1.E14 v1(68.85,42.16) ; P1.A1 v1(72.66,59.94) ; P1.A17 v1(72.66,39.62) ; v2(49.6,38.3) 49.19,37.89 48.06,37.89 ; P1.B22 v1(71.39,33.27) ; P1.E11 68.2,46.6 v1(67.6,46) ; P1.J1 v1(63.77,59.94) ; P1.A8 v1(72.66,51.05) ; v2(46.3,42.1) 45.62,42.1 45.47,42.25 C24.2 ; P1.K39 v1(61.23,10.41) ; v1(68.85,24.38) P1.E29 ; P1.F2 v1(66.31,58.66) ; P1.G17 v1(65.04,38.34) ; P1.G20 v1(66.31,35.8) ; P1.C13 v1(71.4,44.7) ; P1.B31 v1(72.66,21.84) ; v1(65.1,47.2) 65.1,47.18 P1.G11 ; P1.H21 v1(63.77,33.27) ; P1.H9 v1(65.04,49.77) P1.G8 ; P1.C33 v1(70.12,19.3) P1.C32 ; P1.D7 69.42,51.68 v1(68.8,52.3) ; P1.B27 v1(71.39,26.91) ; P1.D22 v1(68.85,33.27) ; P1.J23 v1(63.77,30.73) ; P1.F21 v1(67.58,33.27) ; P1.B34 v1(72.66,18.02) ; P1.G35 v1(66.31,15.48) ; v1(72.66,9.13) P1.A40 ; P1.A37 v1(72.66,14.21) ; P1.D13 v1(70.12,43.42) ; P1.B6 v1(72.66,53.59) ; P1.B7 v1(72.66,52.31) ; P1.H39 v1(63.77,10.41) ; P1.H3 v1(63.77,57.4) ; C37.1 v2(49.3,13.25) ; P1.A20 v1(72.66,35.8) ; P1.A4 v1(72.66,56.12) ; P1.J38 v1(63.77,12.95) ; P1.G23 v1(65.04,32) ; P1.C16 v1(71.39,40.88) ; C36.1 v2(50.3,13.25) ; P1.B2 v1(72.66,58.66) ; P1.D6 v1(68.85,53.59) ; P1.F27 v1(66.31,26.91) ; P1.A28 v1(72.66,25.64) ; P1.H33 v1(65.04,19.3) ; P1.J32 v1(62.5,19.3) ; P1.C38 v1(71.39,12.95) ; v1(71.39,23.11) P1.B30 ; P1.K3 v1(62.5,57.4) ; P1.J20 v1(63.77,34.53) ; P1.F36 v1(67.58,15.48) ; 54,44.39 52.69,44.39 52.3,44 v2(52.3,44.1) ; P1.G32 v1(66.31,19.3) ; P1.E5 v1(68.85,54.85) ; P1.H30 v1(63.77,21.84) ; P1.G26 v1(66.31,28.18) ; P1.A32 v1(72.66,20.57) ; P1.D25 v1(68.85,29.45) ; v1(72.66,10.41) P1.B39 ; C38.1 v2(48.3,13.25) ; P1.D19 v1(68.85,35.8) ; P1.C4 v1(71.39,56.12) ; v2(52.5,6.4) 52.5,6.8 52.73,7.04 52.73,8.3 ; P1.J35 v1(63.77,15.48) ; C20.2 v2(29.7,47.1) ; P1.G38 v1(66.31,12.95) ; P1.H36 v1(65.04,15.48) ; P1.B11 v1(72.66,47.23) ; v1(63.77,38.34) P1.H18 ; P1.C21 v1(71.39,34.53) ; R21.2 v2(58.3,40) ; P1.A24 v1(72.66,30.73) ; P1.G1 v1(66.31,59.94) ; P1.K9 v1(61.23,49.77) ; C41.1 v2(41.5,19.55) ; P1.C36 v1(70.12,15.48) ; P1.E23 v1(68.85,32) ; v1(71.39,15.48) P1.B35 ; P1.J40 v1(62.5,10.41) ; P1.F6 v1(67.6,52.3) ; P1.A16 v1(72.66,40.88) ; IC15.4 v2(27.9,11.1) ; P1.C17 v1(71.39,39.62) ; P1.E20 v1(68.85,34.53) ; P1.C25 v1(71.39,29.45) ; P1.K27 v1(62.5,26.91) ; P1.J29 v1(62.5,24.38) ; P1.B26 v1(71.39,28.18) ; P1.K6 v1(61.1,52.95) ; P1.C28 v1(71.39,25.64) ; v1(72.66,44.7) P1.A13 ; P1.A21 v1(72.66,34.53) ; P1.A5 v1(72.66,54.85) ; P1.C8 v1(71.39,51.05) ; P1.A12 v1(72.66,45.97) ; P1.K30 v1(62.5,21.84) ; P1.A25 v1(72.66,29.45) ; C40.1 v2(41.5,20.55)
  BOTTOM w0.4: v2(41.35,4.25) C46.1 40.72,5.3 40.67,5.25 REG1.2 ; IC1.4 v2(50.19,4.4) ; C42.1 v2(41.5,18.55) ; J4.17 v2(34.5,34.5) ; J4.1 v2(30.4,32.5) ; J4.10 v2(30.4,39.7) ; J4.11 v2(34.5,39.3) ; C47.1 v2(40.1,2.75) ; IC1.3 v2(51.46,4.4) ; J4.14 v2(34.5,36.9) ; J4.20 v2(34.5,32.1)
  BOTTOM w0.5: C45.1 v2(40.85,8.25) ; R34.1 v2(41.5,17.3) ; C35.1 v2(52.55,13.25)
  vias: v2(47.52,28.57) v2(47.8,21.8) v2(47.8,19.3) v2(49.05,20.55) v2(55.45,28.65)
P2V5: length 12.8
  BOTTOM w0.4: REG1.5 37.05,7.85 C45.2
  BOTTOM w0.6: REG1.5 36.05,6.2 34.7,4.85 34.7,3.35 33.35,2 30.83,2 J7.3
P3V3: length 79.6
  TOP w0.3: C2.1 v2(30.6,50.8) ; C6.1 40.85,54.65 v2(40.9,54.7) ; C4.1 36.3,54.5 v2(36.5,54.7) ; C1.1 24.65,49.12 v2(24.7,49.08) ; C7.1 51.5,62.4 v2(51.45,62.45) ; v2(31.2,54.7) 31.45,54.45 C3.1 ; C13.1 18.3,17.77 18.57,18.05 19.75,18.05 v2(20.3,17.5) ; v2(36.4,52.1) 36.3,52.2 C5.1 ; C17.2 v2(33.4,8) ; C15.2 v2(18.85,10.55) ; C11.2 49.5,37.3 v2(49.56,37.24)
  BOTTOM w0.2: v2(41.35,7.25) C46.2 REG1.1 38.55,6.2 38.27,5.92 38.27,4.58 38.55,4.3 REG1.3 ; C36.2 50.3,16.05 ; v2(51,23.52) 51,24.3 C29.2 C30.2 49.55,23.85 IC12.24 ; IC12.12 44.55,20.3 ; C40.2 44.05,20.55 ; C41.2 44.05,19.55 ; C37.2 49.3,16.05 ; v1(70.12,14.21) 70.12,12.95 P1.D38 ; IC12.18 v2(46.55,23.93) ; IC12.10 44.55,19.3 ; v2(36.4,52.1) 35.95,51.65 IC4.10 ; v2(36.5,54.7) 36.4,54.7 35.95,55.15 IC4.29 ; IC12.31 50.8,19.3 ; R41.1 v2(34.3,6.9) ; R40.1 v2(34.3,11.8) ; IC12.1 49.55,17.05 ; v2(31.2,54.7) 31.45,54.95 IC4.20 ; IC12.32 51.05,18.8 ; IC12.2 49.05,17.05
  BOTTOM w0.25: IC4.38 40.44,55.99 40.44,55.16 v2(40.9,54.7)
  BOTTOM w0.3: IC16.5 20.1,17.3 v2(20.3,17.5) ; IC16.1 v2(15.35,15.8) ; IC6.14 v2(18.85,10.55) ; 48.06,37.24 v2(49.56,37.24) ; v2(55.8,26.13) 55.8,26.1 56.15,25.75 R30.2 ; P1.D40 v1(68.85,10.41) ; v2(44.8,34.8) 43.7,34.8 43.4,34.5 L2.1 43.4,33.2 43.6,33 44.7,33 v2(44.8,33.1) ; P1.D36 v1(70.12,14.21) ; v2(44.7,36.4) 43.7,36.4 43.4,36.7 L1.2 43.4,38.1 43.6,38.3 44.65,38.3 v2(44.7,38.25) ; 32.3,8.43 32.97,8.43 v2(33.4,8) ; R32.2 v2(58.1,21.9) ; IC2.1 v2(51.45,62.45) ; R31.2 v2(52.4,26.1) ; R33.2 v2(58.1,18.4) ; P1.C39 v1(71.39,10.41)
  BOTTOM w0.4: 51.57,17.6 C34.2 ; C34.2 52.53,17.6 ; C34.2 52.05,17.12 ; R28.1 R29.1 v2(24.65,31.5) ; 51.67,16.2 C35.2 ; C35.2 53.43,16.2 ; C35.2 52.55,16.98 ; C35.2 52.55,15.42 ; v2(24.65,40.33) R22.1 R23.1 R24.2 R25.2 ; 53.05,17.12 C33.2 ; C33.2 53.53,17.6 ; C33.2 52.57,17.6 ; 50.78,15 C36.2 49.82,15
  vias: v2(44.3,20.3) v2(44.3,19.55) v2(49.3,16.3) v2(50.3,17.3) v2(51.05,18.05) v2(51.05,16.3)
P12V: length 86.6
  TOP w0.5: J8.3 17.72,6.2 23.2,6.2 23.9,5.5 23.9,2.2 24.8,1.3 59.2,1.3 63.5,5.6 72.8,5.6 74,6.8 74,11.8 ; 74,11.8 70.7,11.8 70.4,12.1 70.4,13.22 v1(71.39,14.21) ; 74,11.8 74,16.3 73.5,16.8 v1(70.1,16.8)
  BOTTOM w0.15: P1.C37 v1(71.39,14.21)
  BOTTOM w0.3: v1(70.1,16.8) 70.1,16.78 P1.C35
CDR_LOL: length 45.3
  TOP w0.15: v2(45.05,23.3) 45.05,14.57 45.4,14.22 v2(45.4,13.62)
  BOTTOM w0.15: IC16.2 17.6,16.3 17.9,16.6 17.9,17 19.3,18.4 39.3,18.4 40.1,17.6 40.1,14.6 41.6,13.1 44.88,13.1 v2(45.4,13.62)
  BOTTOM w0.2: v2(45.05,23.3) 45.35,23 IC12.16
CDR_LOS: length 39.9
  TOP w0.15: v2(42.9,25.9) 42.9,22.83 v2(39.57,19.5)
  BOTTOM w0.15: IC12.22 48.55,24.45 47.5,25.5 44.7,25.5 44.67,25.47 43.33,25.47 v2(42.9,25.9) ; IC16.3 17.1,16.8 19.2,18.9 38.97,18.9 v2(39.57,19.5)
CTRLVCC: length 5.8
  TOP w0.3: v2(55,6.4) C18.2
  BOTTOM w0.3: R38.2 v2(48.5,4.2) ; IC1.8 54,7.8 54.5,7.3 54.5,6.9 v2(55,6.4) ; R39.2 v2(47.4,4.2) ; P1.D32 v1(68.85,19.3)
CVCC: length 101.5
  TOP w0.3: v2(51.4,59.4) C8.2 ; C14.2 18.3,15.6 18.5,15.4 v2(20.2,15.4) ; R7.2 v2(52.3,42)
  TOP w0.4: 27.42,8.95 C16.2 ; C16.2 27.9,8.47 ; C16.2 28.38,8.95 ; 27.06,2.25 J7.5 ; J7.5 28.04,3.23 ; J7.5 26.08,3.23 ; J7.5 27.06,4.21 ; 29.6,4.79 J7.4 ; J7.4 30.58,5.77 ; J7.4 28.62,5.77 ; J7.4 29.6,6.75 ; J7.1 32.14,4.21 ; J7.1 31.16,3.23 ; J7.1 32.14,2.25 ; J7.1 33.12,3.23
  TOP w1: 59.6,31.5 59.6,25.3 53.8,19.5 53.8,11.4 51.7,9.3 48.6,9.3 47.2,10.7 30.8,10.7 29.3,12.2 28.4,12.2
  BOTTOM w0.3: R16.2 v2(58.3,46) ; IC16.8 19.7,15.8 20.1,15.4 v2(20.2,15.4) ; C23.2 52.35,37.15 52.3,37.2 ; R42.2 v2(24.7,10.3) ; R18.2 v2(58.3,43.6) ; R43.2 v2(24.7,8.55) ; R19.2 v2(58.3,42.4) ; 52.6,37.9 52.61,37.89 55.41,37.89 v2(55.7,37.6) 55.34,37.24 52.54,37.24 52.5,37.2 ; R20.2 v2(58.3,41.2) ; v2(51.4,59.4) 51.45,59.35 IC2.8 ; R17.2 v2(58.3,44.8) ; v2(27.9,7.7) 27.92,7.72 27.92,8.41 27.9,8.43
  BOTTOM w1: v2(51.4,59.4) 50,59.4 49.2,58.6 49.2,55.3 51.8,52.7 51.8,46.8 50.8,45.8 50.8,44.5
DATAOUT_N: length 6.8
  BOTTOM w0.12: C31.1 55.04,20.34 52.96,20.34 52.63,20.67 50.93,20.67 50.8,20.8 IC12.28
  BOTTOM w0.14: C31.1 55.45,21.7 R32.1
DATAOUT_P: length 6.9
  BOTTOM w0.12: C32.1 55.1,20.1 52.86,20.1 52.53,20.43 50.93,20.43 50.8,20.3 IC12.29
  BOTTOM w0.14: R33.1 55.45,18.7 C32.1
FMC_GA0: length 37.1
  BOTTOM w0.15: P1.C34 71.4,16.75 73.7,16.75 74.05,16.4 74.05,12.1 73.65,11.7 61.2,11.7 60.5,11 60.5,6.65 55.65,1.8 53.2,1.8 52.73,2.27 IC1.2
FMC_GA1: length 24.1
  BOTTOM w0.15: P1.D35 68.85,15.48 68.85,14.56 68.54,14.25 61.6,14.25 61.1,13.75 61.1,12.1 56.9,7.9 56.9,5.1 54.8,3 IC1.1
FMC_LA00_P: length 19.9
  BOTTOM w0.15: 54,43.74 54.04,43.7 55.1,43.7 55.3,43.9 55.3,46.7 55.8,47.2 R15.1 56.55,48.45 60.35,52.25 60.35,53.05 60.9,53.6 63.6,53.6 63.8,53.4 63.8,52.7 64.2,52.3 65.03,52.3 P1.G6
FMC_LA02_N: length 17.3
  BOTTOM w0.15: 54,42.44 55.09,42.44 55.9,43.25 55.9,44.65 56.05,44.8 R17.1 56.55,45.15 56.8,45.4 59,45.4 60,46.4 60,50 61,51 63.5,51 64.09,50.41 P1.H8
FMC_LA02_P: length 18.1
  BOTTOM w0.15: P1.H7 64.12,51.68 63.5,52.3 61.3,52.3 59.7,50.7 59.7,47 59.3,46.6 56.9,46.6 56.55,46.25 R16.1 55.8,46 55.6,45.8 55.6,43.6 55.09,43.09 54,43.09
FMC_LA03_N: length 18.6
  BOTTOM w0.15: P1.G10 65.68,47.52 66.3,46.9 66.3,46.4 66,46.1 64.1,46.1 63.8,45.8 63.8,45.1 63.4,44.7 61.4,44.7 60.9,44.2 60.9,41.8 59.7,40.6 57.15,40.6 R21.1 55.7,40 55.54,39.84 54,39.84
FMC_LA03_P: length 16.2
  BOTTOM w0.15: 54,41.79 54.89,41.79 56.55,43.45 R18.1 56.55,43.95 56.8,44.2 59.1,44.2 60.4,45.5 60.4,47.6 61.3,48.5 65.04,48.5 P1.G9
FMC_LA04_N: length 15.3
  BOTTOM w0.15: P1.H11 63.91,47.1 61.5,47.1 61.1,46.7 61.1,45.1 60.5,44.5 60.5,43 59.3,41.8 56.9,41.8 56.55,41.45 R20.1 55.84,40.49 54,40.49
FMC_LA04_P: length 14.9
  BOTTOM w0.15: 54,41.14 55,41.14 56.26,42.4 R19.1 56.55,42.65 56.9,43 59.7,43 60.1,43.4 60.1,44.7 60.7,45.3 60.7,46.7 61.37,47.38 63.91,47.38 P1.H10
FMC_LA07_N: length 68.9
  TOP w0.12: v1(63.8,43.4) 63.3,42.9 61.9,42.9 61.3,42.3 61.3,23.64 55.6,17.94 55.6,11.24 52.2,7.84 46.5,7.84 44.8,9.54 29.7,9.54 29.4,9.84 v2(29.4,9.9)
  BOTTOM w0.12: R42.1 27.07,9.72 29.02,9.72 29.2,9.9 v2(29.4,9.9)
  BOTTOM w0.15: P1.H14 v1(63.8,43.4)
FMC_LA07_P: length 70.4
  TOP w0.12: v1(65.1,43.4) 64.36,42.66 62,42.66 61.54,42.2 61.54,23.54 55.84,17.84 55.84,11.14 52.3,7.6 46.4,7.6 44.7,9.3 29.8,9.3 v2(29.4,8.9)
  BOTTOM w0.12: R43.1 27.02,9.07 IC15.2 29.22,9.07 v2(29.4,8.9)
  BOTTOM w0.15: P1.H13 65.07,43.4 v1(65.1,43.4)
FMC_LA08_N: length 81.2
  TOP w0.12: v2(57.6,15) 57.14,15.46 57.14,15.9 58.56,17.32 64.76,17.32 65.8,18.36 65.8,43.1 v1(66.2,43.5)
  BOTTOM w0.12: IC16.6 19.5,16.7 21.4,16.7 22.44,17.74 38.86,17.74 39.4,17.2 39.4,13.5 40.6,12.3 53.2,12.3 56.1,15.2 56.87,15.2 56.94,15.13 57.02,15.04 v2(57.6,15)
  BOTTOM w0.15: v1(66.2,43.5) 66.2,43.54 P1.G13
FMC_LA08_P: length 83.1
  TOP w0.12: v2(56.8,14.3) 56.9,14.4 56.9,16 58.46,17.56 64.66,17.56 65.56,18.46 65.56,44.03 65.7,44.17 65.7,44.19 65.78,44.26 v1(66.3,44.7)
  BOTTOM w0.12: v2(56.8,14.3) 56.84,14.88 56.77,14.96 56.2,14.96 53.3,12.06 40.5,12.06 39.16,13.4 39.16,17.1 38.76,17.5 22.54,17.5 21.5,16.46 19.56,16.46 IC16.7
  BOTTOM w0.15: P1.G12 66.3,44.71 v1(66.3,44.7)
FMC_SCL: length 57.2
  TOP w0.15: J5.3 34.07,15.2 40.9,15.2 43.7,12.4 50.5,12.4 51.46,11.44 v2(51.46,10.7)
  BOTTOM w0.15: R38.1 50.17,6 51.46,7.3 IC1.6 v2(51.46,10.7) 57.6,10.7 60.85,13.95 60.85,16 61.6,16.75 67.35,16.75 67.6,17 67.6,17.75 67.85,18 71.1,18 71.35,18.25 71.35,21.88 P1.C30
FMC_SDA: length 63.8
  TOP w0.15: J6.3 25.07,14.7 40.5,14.7 43.3,11.9 49.3,11.9 v2(50.2,11)
  BOTTOM w0.15: R39.1 47.4,7 48.7,8.3 IC1.5 50.19,9.3 50.2,9.31 v2(50.2,11) 50.7,11.5 57.7,11.5 60.5,14.3 60.5,19.6 61.6,20.7 70.27,20.7 P1.C31
IN_N: length 6.7
  BOTTOM w0.12: IC12.4 48.05,17.55 47.92,17.42 47.92,16.08 46.55,14.71 44.66,14.71 C44.2
IN_P: length 6.4
  BOTTOM w0.12: C43.2 44.8,14.95 46.45,14.95 47.68,16.18 47.68,17.42 47.55,17.55 IC12.5
S10: length 12.3
  BOTTOM w0.15: IC4.1 40.45,49.25 41.12,48.58 42.72,48.58 45.9,45.4 45.9,43.4 46.1,43.2 46.86,43.2 46.97,43.09 48.06,43.09
S11: length 13.1
  BOTTOM w0.15: 48.06,42.44 46.97,42.44 46.51,42.9 45.9,42.9 45.5,43.3 45.5,45.3 42.6,48.2 40.9,48.2 39.95,49.15 IC4.2
S20: length 15.6
  BOTTOM w0.15: 48.06,41.79 46.97,41.79 46.58,41.4 44.2,41.4 43.8,41.8 43.8,44.4 40.4,47.8 39.66,47.8 38.45,49.01 IC4.5
S21: length 16.7
  BOTTOM w0.15: IC4.6 37.95,48.05 39.3,46.7 40.9,46.7 43.4,44.2 43.4,41.7 44.06,41.04 46.87,41.04 46.97,41.14 48.06,41.14
S30: length 21.3
  BOTTOM w0.15: 48.06,40.49 46.97,40.49 46.76,40.7 43.9,40.7 43,41.6 43,44 40.7,46.3 34.8,46.3 34.5,46.6 34.5,48.3 33.95,48.85 IC4.14
S31: length 22.2
  BOTTOM w0.15: IC4.15 33.45,48.75 34.1,48.1 34.1,46.4 34.7,45.8 40.6,45.8 42.6,43.8 42.6,41.4 43.7,40.3 46.5,40.3 46.96,39.84 48.06,39.84
S40: length 24.8
  BOTTOM w0.15: 48.06,39.19 46.91,39.19 46.2,39.9 43.5,39.9 42.2,41.2 42.2,43.4 40.2,45.4 32.6,45.4 31.5,46.5 31.5,48.41 31.95,48.85 IC4.18
UNNAMED_2_CAPCERSMDCL2_I68_B: length 2.3
  BOTTOM w0.4: REG1.4 37.05,2.95 37.25,2.75 C47.2
UNNAMED_2_CON400P40ABCDEFGHJK_I: length 1.3
  BOTTOM w0.15: P1.D30 P1.D31
UNNAMED_2_PCA9517_I162_EN: length 2
  BOTTOM w0.15: TP2.1 IC15.5
UNNAMED_11_ADN2814_I23_CF1: length 5.1
  BOTTOM w0.2: C39.1 41.8,22.53 42.07,22.8 44.05,22.8 44.3,22.55 44.3,22.05 44.55,21.8 IC12.15
UNNAMED_11_ADN2814_I23_CF2: length 2.3
  BOTTOM w0.2: C39.2 43.98,21.8 44.48,21.3 IC12.14
UNNAMED_11_ADN2814_I23_SQUELCH: length 3.1
  TOP w0.15: v2(52.4,21.35) 51.5,21.35 R12.1
  BOTTOM w0.15: IC12.27 50.85,21.3 50.9,21.35 v2(52.4,21.35)
UNNAMED_11_ADN2814_I23_THRADJ: length 3.8
  BOTTOM w0.2: IC12.9 44.03,18.8 43.78,18.55 C42.2 43.25,18.1 R34.2
UNNAMED_11_ADN2814_I23_VREF: length 3.2
  BOTTOM w0.2: C38.2 48.3,16.05 48.55,16.3 IC12.3
UNNAMED_11_CON20PSFP_I175_LOS: length 3
  BOTTOM w0.2: J4.8 26.85,38.1 26.45,38.5 R23.2
UNNAMED_11_CON20PSFP_I175_MODDE: length 2.8
  BOTTOM w0.2: R25.1 J4.6
UNNAMED_11_CON20PSFP_I175_RATES: length 2.9
  BOTTOM w0.2: J4.7 27.12,37.3 26.92,37.5 R24.1
UNNAMED_11_CON20PSFP_I175_VCCR: length 5.3
  BOTTOM w0.2: J4.15 37.3,36.1 37.85,36.65 37.85,37.25 38.1,37.5 39.55,37.5 39.8,37.25 L1.1
UNNAMED_11_CON20PSFP_I175_VCCT: length 5
  BOTTOM w0.2: L2.2 38.42,34 38.05,34.37 38.05,34.8 37.6,35.25 36.6,35.25 J4.16
UNNAMED_11_CON20PSFP_I175_VEER: length 3
  BOTTOM w0.2: J4.9 26.95,38.9 26.35,39.5 R22.2
VPP: length 49.9
  BOTTOM w0.6: J7.6 25.6,4.31 25.6,2.25 26.85,1 57.3,1 61.6,5.3 61.6,6.96 P1.H40 P1.G39

## Copper pours and planes (outline as drawn; the poured copper is in the pictures)
GND on L3GND (solid shape): 75.86,0.64 22.84,0.64 22.84,1.6 22.36,2.76 21.2,3.24 12.14,3.24 12.14,3.7 11.66,4.86 10.5,5.34 0.64,5.34 0.64,65.06 26.1,65.06 27.26,65.54 27.74,66.7 27.74,68.36 75.86,68.36
P3V3 on L2PWR (solid shape): 75.86,0.64 22.84,0.64 22.84,1.6 22.36,2.76 21.2,3.24 12.14,3.24 12.14,3.7 11.66,4.86 10.5,5.34 0.64,5.34 0.64,65.06 26.1,65.06 27.26,65.54 27.74,66.7 27.74,68.36 75.86,68.36
P3V3 on BOTTOM: 43.8,20.8 43.8,19.05 44.8,19.05 44.8,20.8
P3V3 on BOTTOM: 49.8,18.05 49.8,18.55 50.3,18.55 50.3,19.55 51.05,19.55 51.05,19.05 52.05,18.05 53.8,18.05 53.8,15.3 51.3,15.3 51.3,14.3 48.55,14.3 48.55,18.05
CTRLVCC on TOP: 45,1.9 45,4.3 46.3,5.6 54.3,5.6 54.3,8.4 62.5,16.6 66.8,16.6 68.2,18 68.2,20.1 69.5,20.1 69.5,8.4 62.2,8.4 55.7,1.9
CVCC on TOP: 53.4,46.6 59.1,46.6 59.1,40.7 56.3,40.7 55.2,39.6 55.2,38.6 55.5,38.3 60.2,38.3 60.2,30.9 56.5,30.9 52.1,35.3 52.1,40.9 53.5,42.3 53.5,46.5
CVCC on TOP: 19.4,16.4 19.4,14.5 20.1,13.8 20.1,7.8 23.9,7.8 25.3,6.4 25.3,2 33.6,2 33.6,7.7 32.8,8.5 28.8,8.5 28.8,13 23.4,13 21.9,14.5 21.9,16.4
CVCC on BOTTOM: 49.4,44.9 49.4,43.4 50.3,42.5 50.3,37.1 50.4,37 52.8,37 52.8,43.3 51.2,43.3 51.2,44.9

## Text on the board
Ref Des/Silkscreen Bottom: EDA-02319-V3 | TTC_FMC
DIMENSION: Filled and Caped Holes | (See PCB Specification)
User.8: 4
User.9: GROUND PLANE | 3
User.17: Figure | Dia. | 0.30 | 0.40 | 0.70 | 0.80 | 0.85 | 0.95 | 1.00 | 1.05 | 2.50 | 2.70 | 1.30 | 1.40 | Metric Drill Legend TOP to BOTTOM | Drill sizes are considered finished. | ALL UNITS ARE IN MILLIMETERS | Tol. | +0.05/-0.05 | TYPE | PLATED | NON-PLATED | QTY | 169 | 175 | 4 | 12 | 1 | 9 | 21 | 6 | 10 | 2 | 417 | TOTAL HOLES:
